# Altium PCB Power_Board_Gan_Cuk.PcbDoc (part 1 of 4)
Units mil, origin at the board's own origin, x right, y up, seen from the top; angles counter-clockwise.
Board outline 9910 x 8913.25 mil, 5 copper layers (Top Layer, Middle 1, HF Layer, Middle 4, Bottom Layer), stack 37.051 mil thick; 394 components, 188 nets, 1156 pads, 1424 vias.
Unrouted connection lines stored in the file: 6.
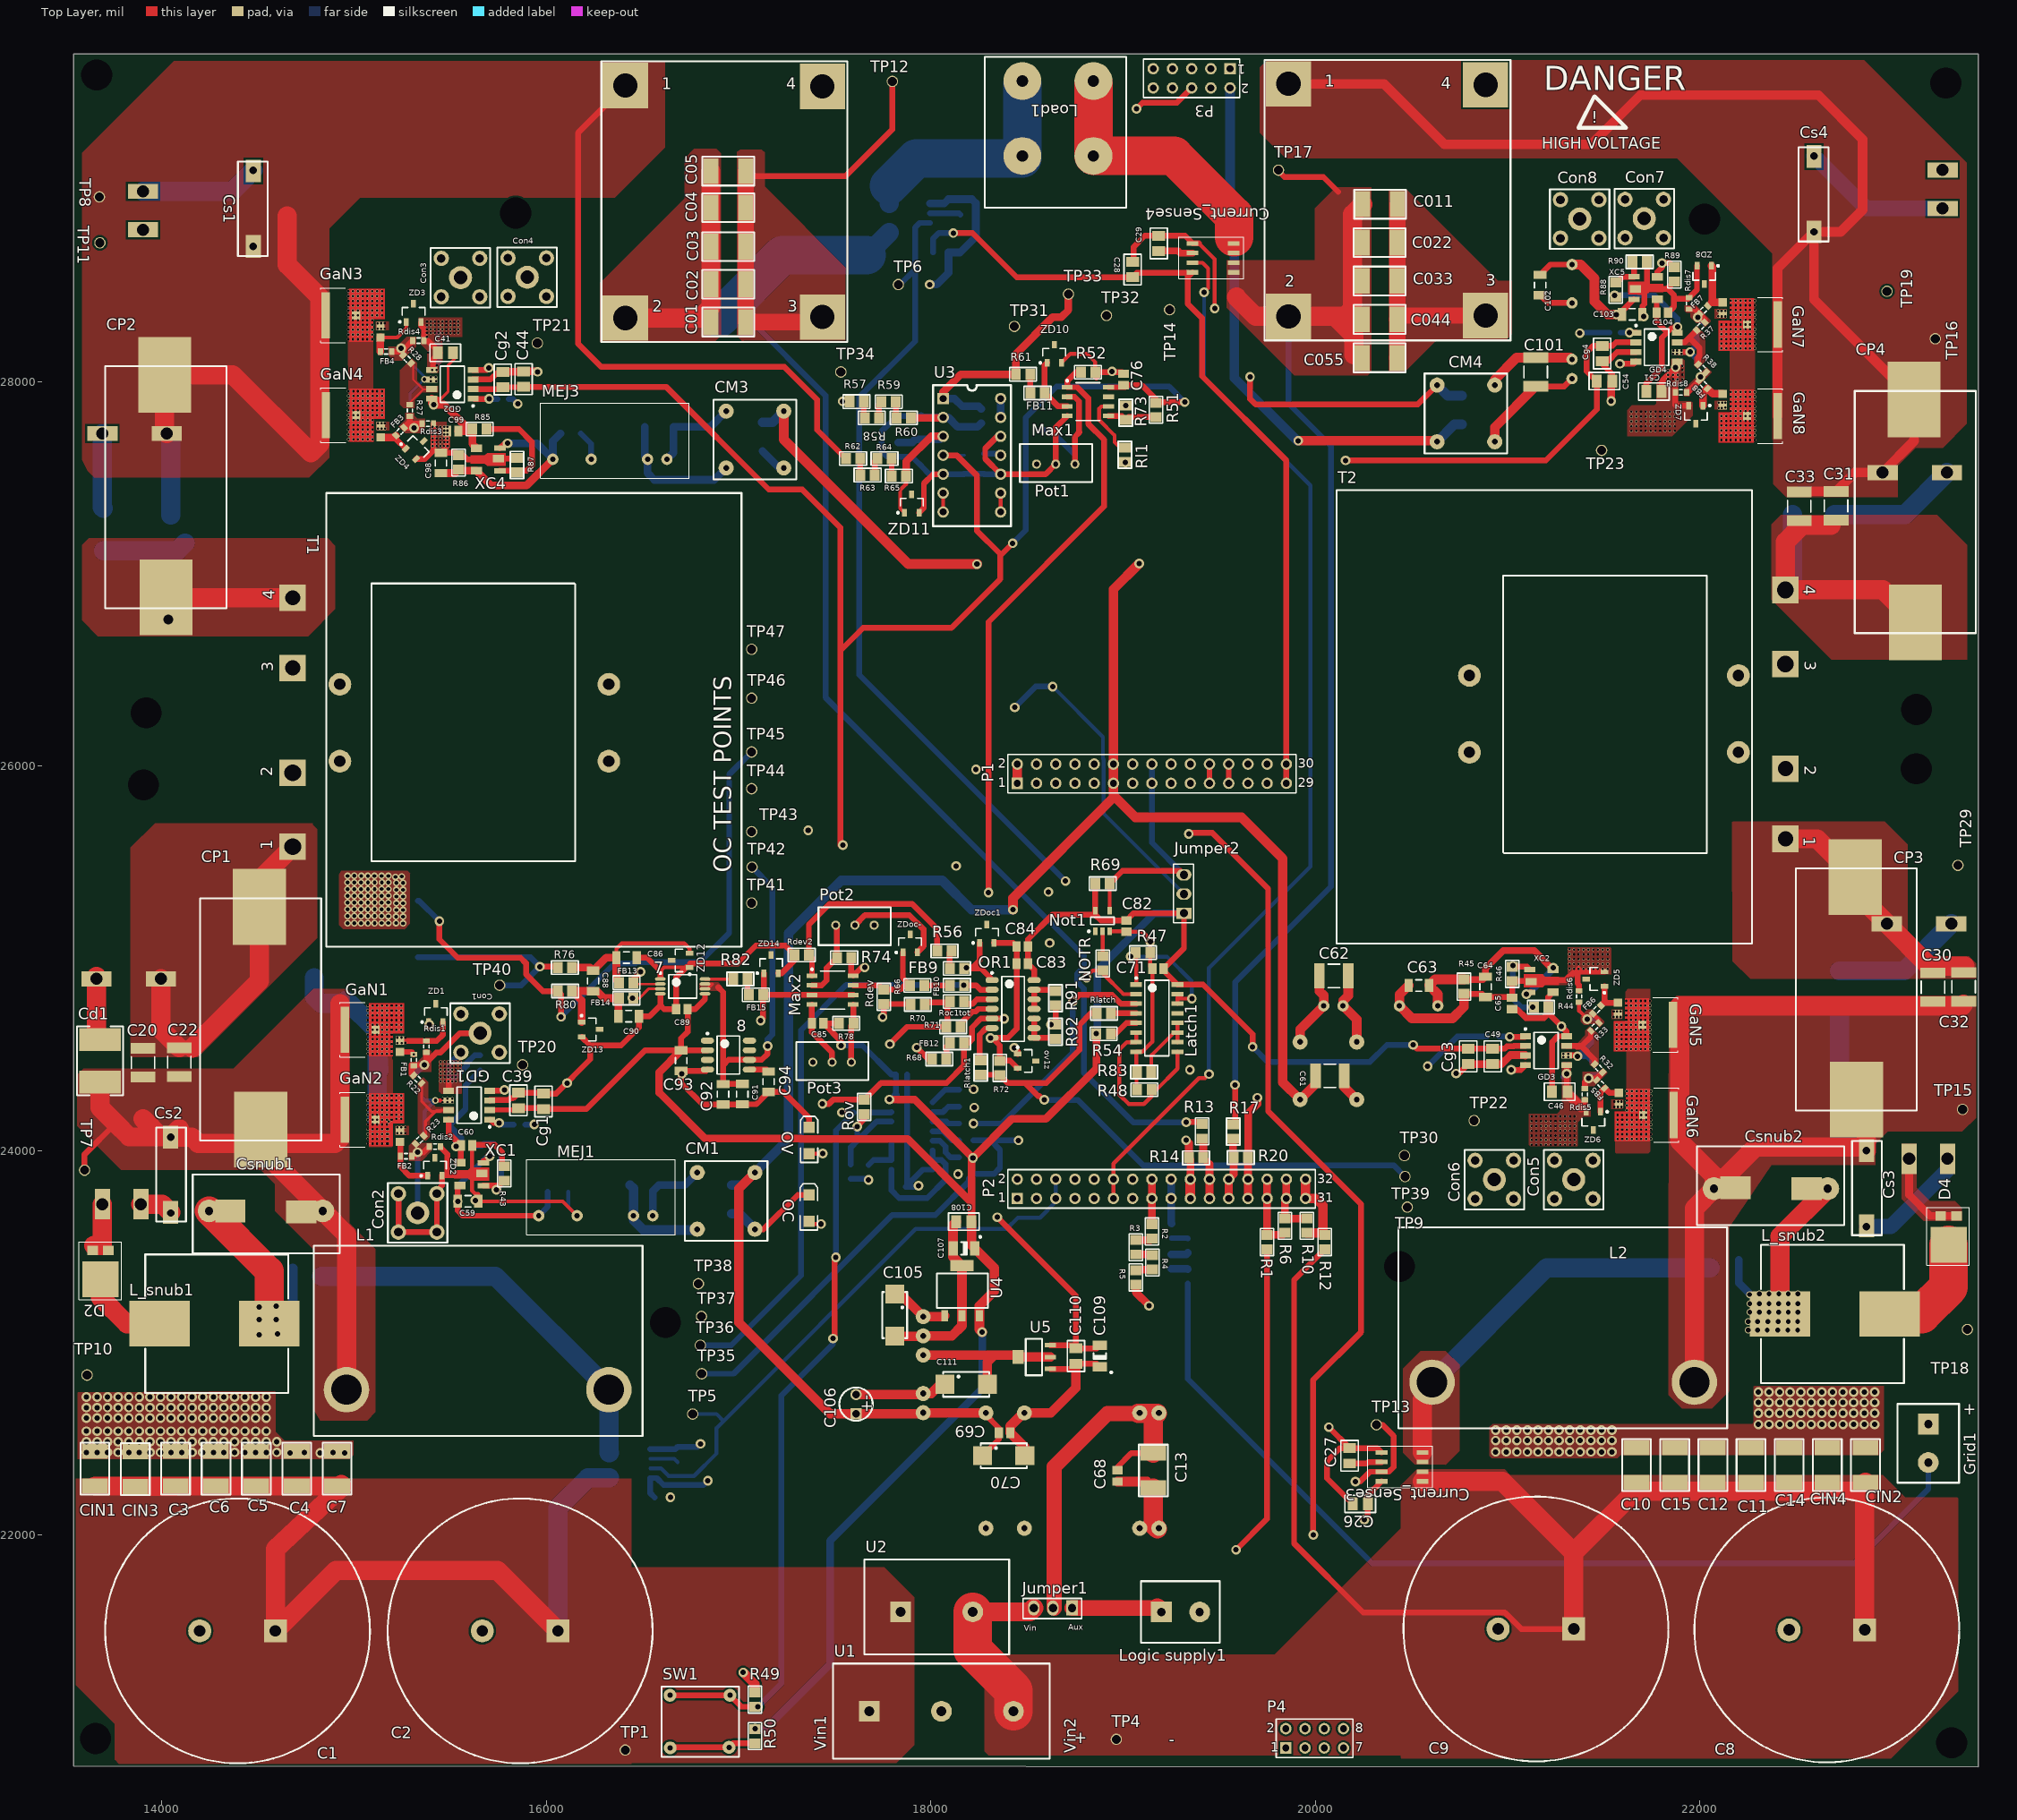
[diagram p0: Top Layer view]
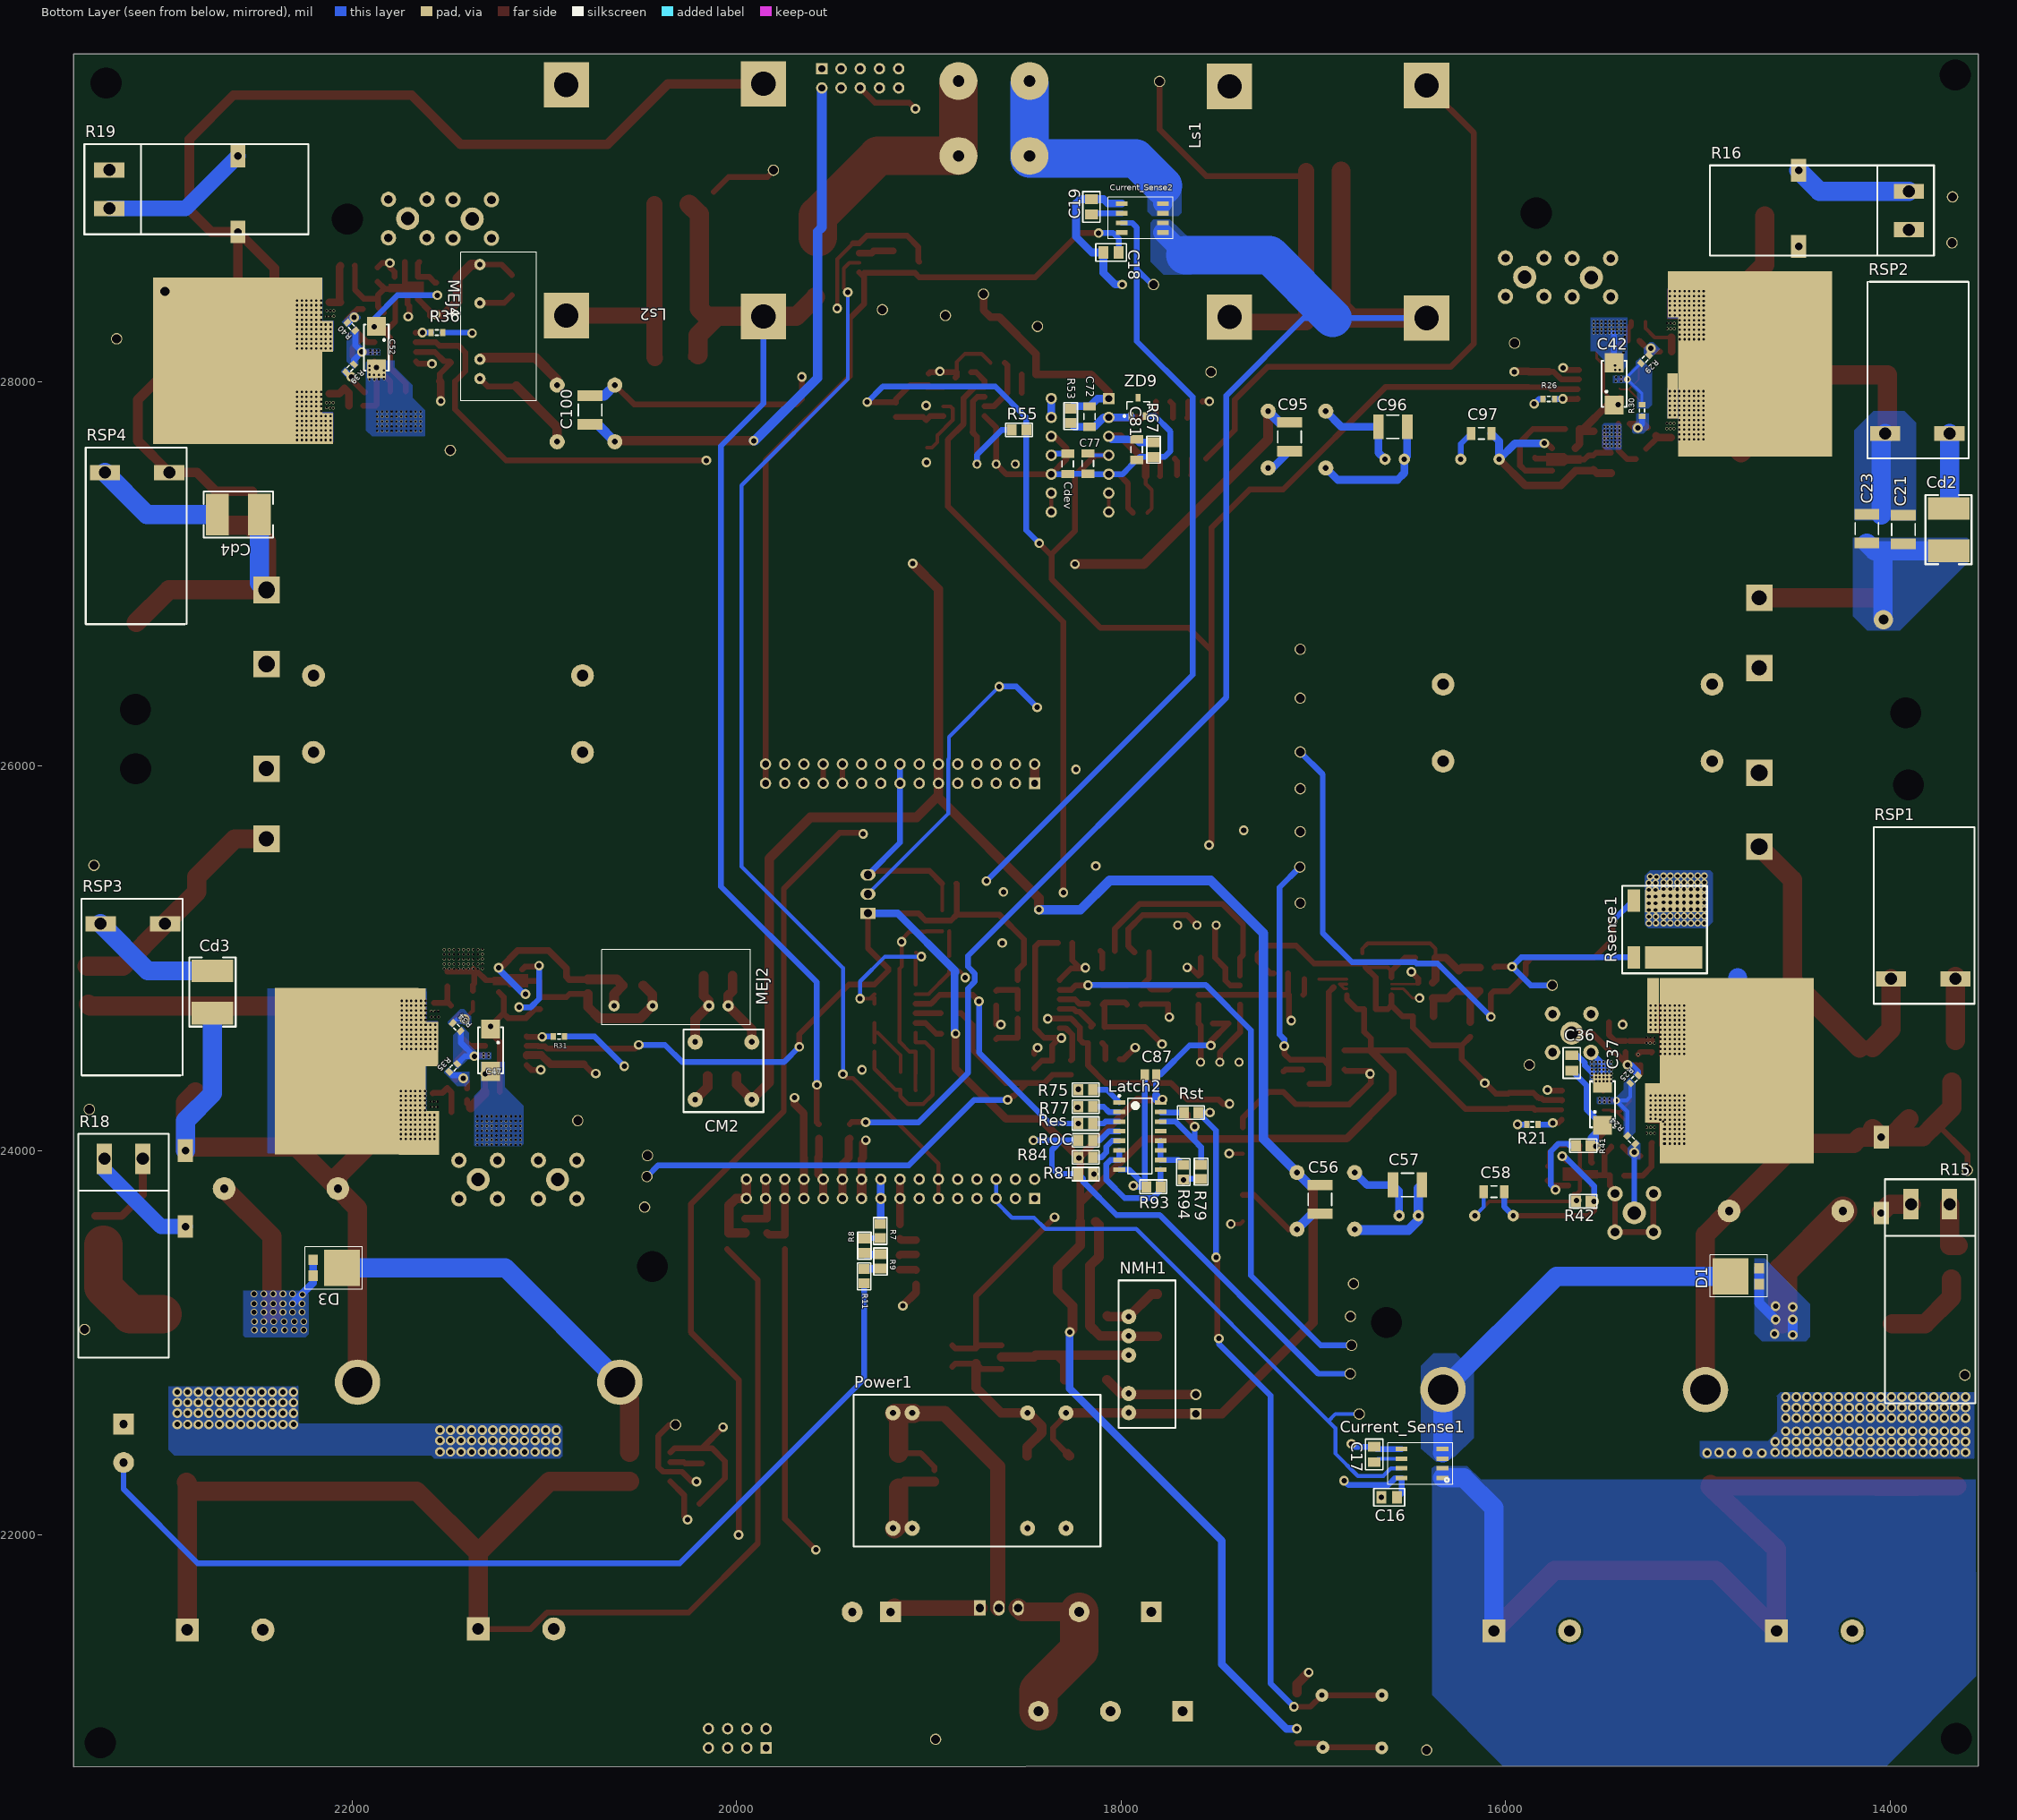
[diagram p1: Bottom Layer view, seen from below]
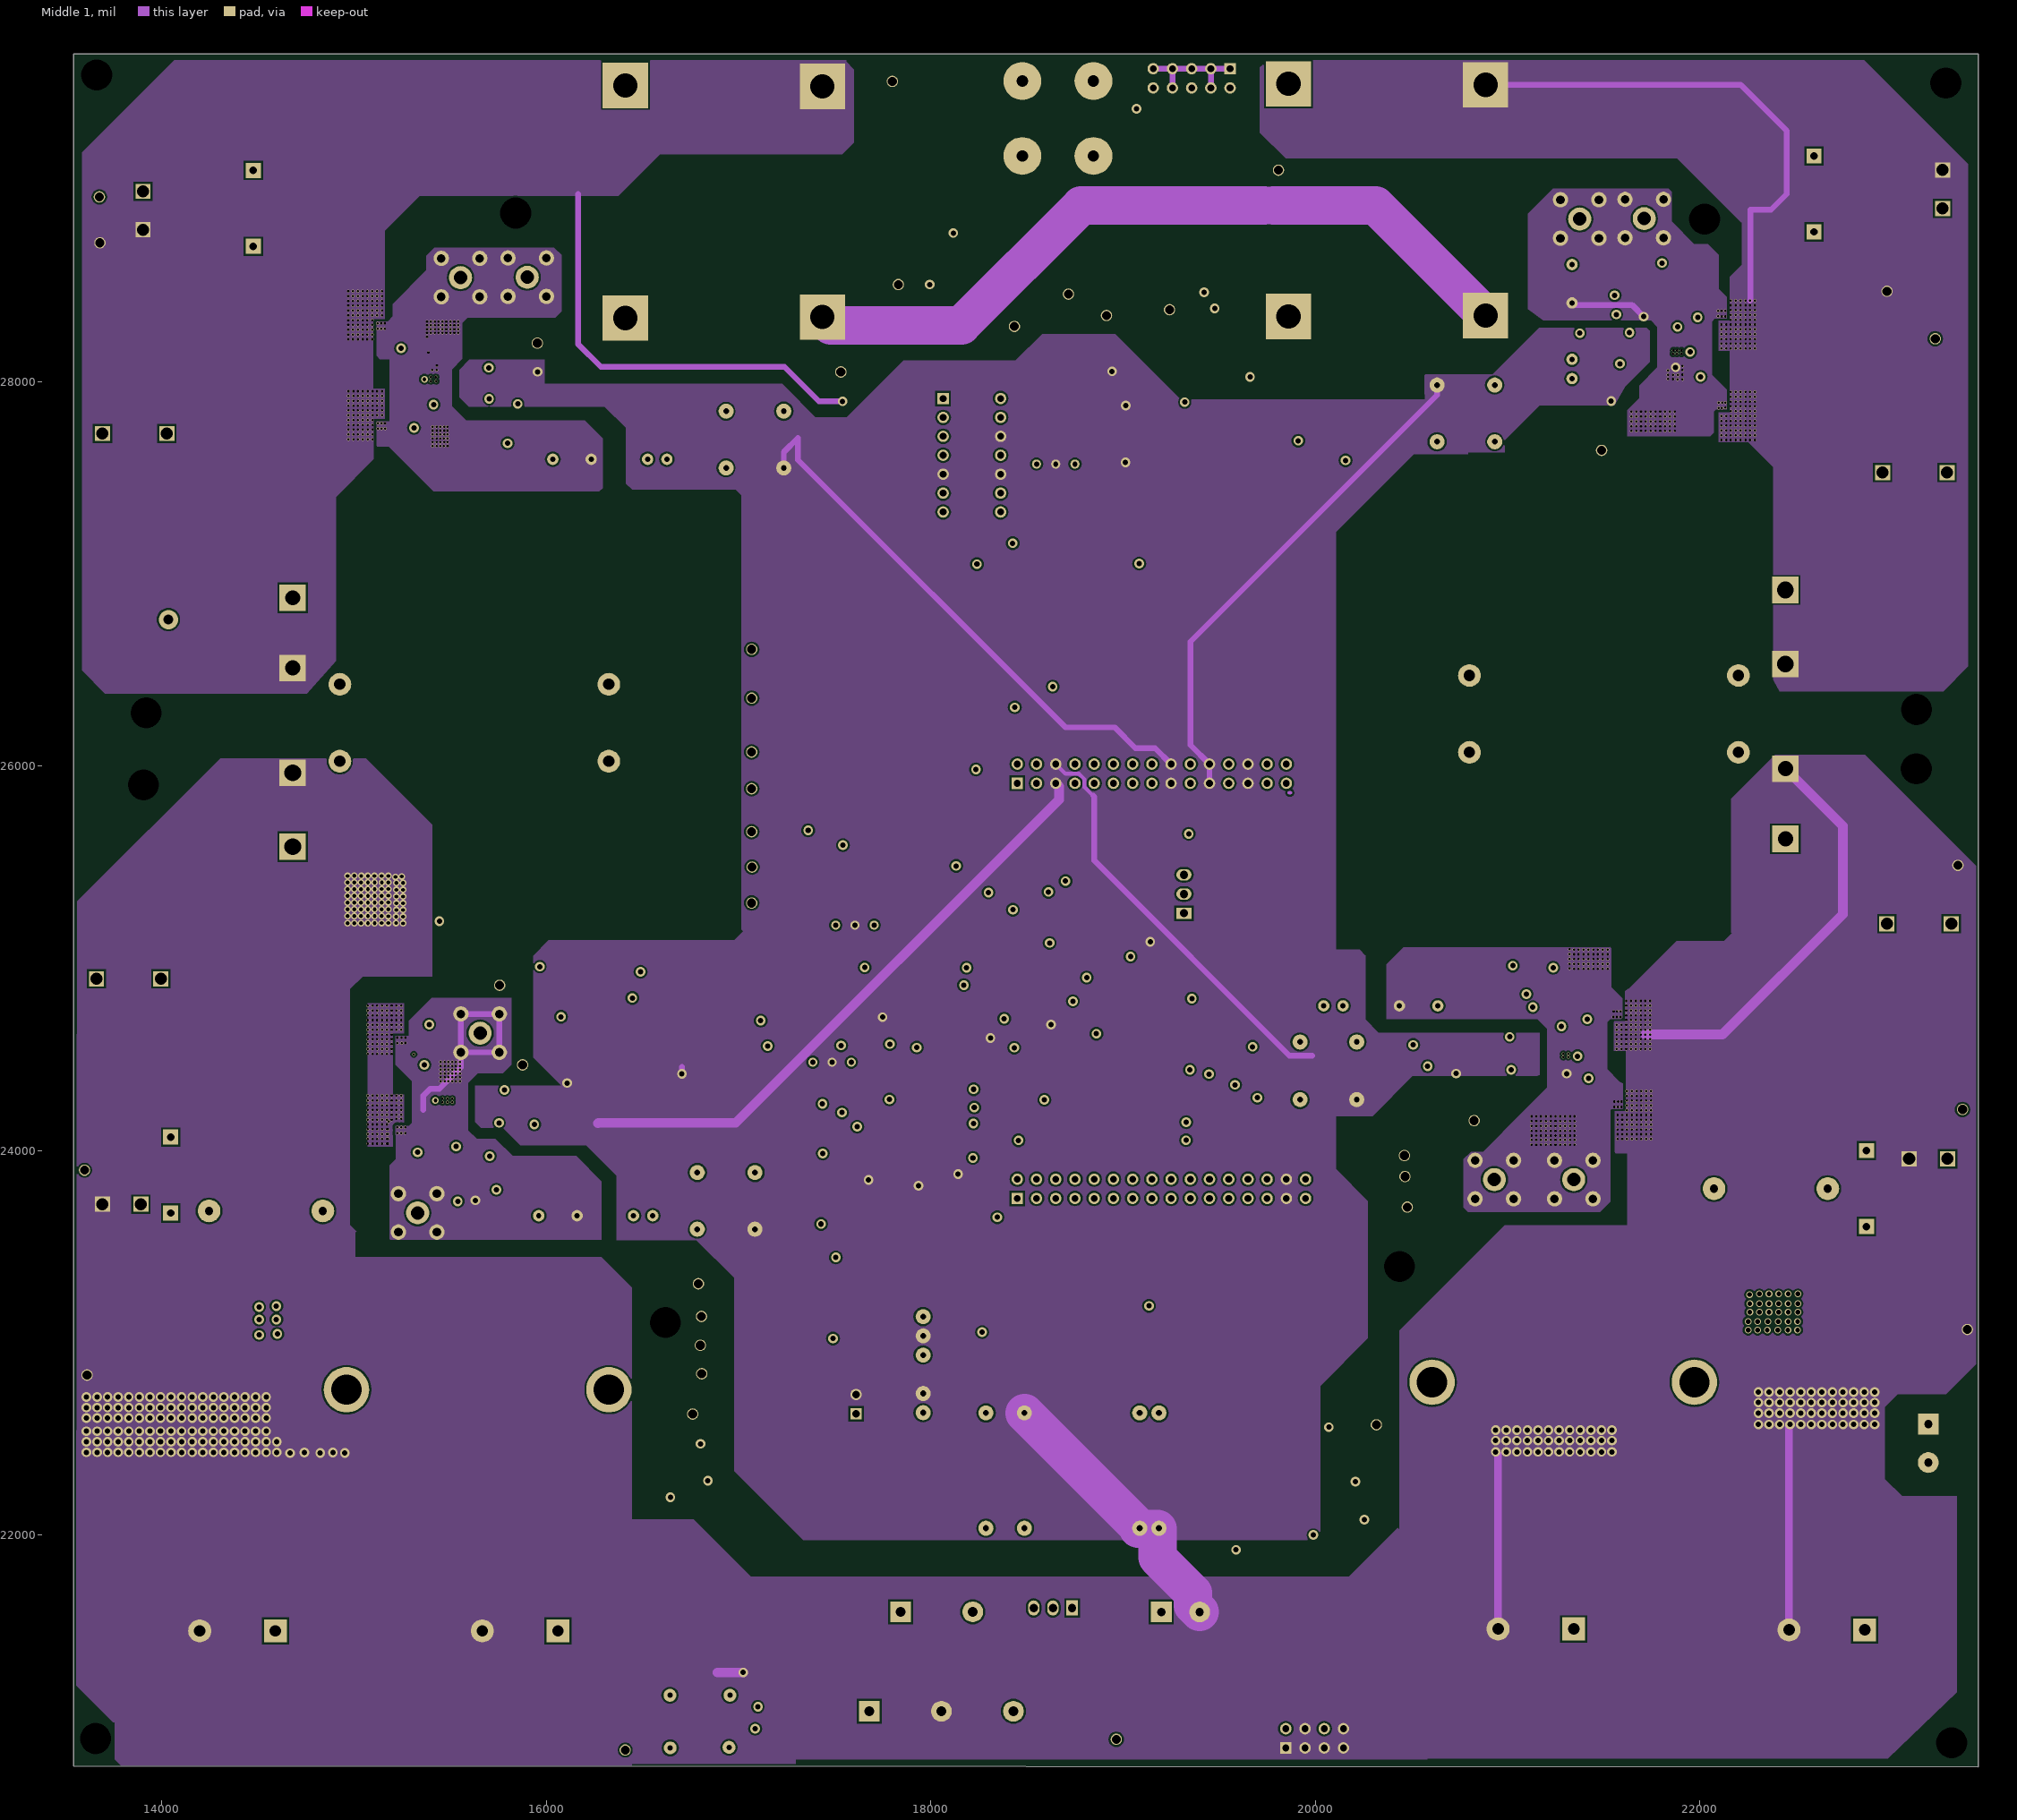
[diagram p2: Middle 1]
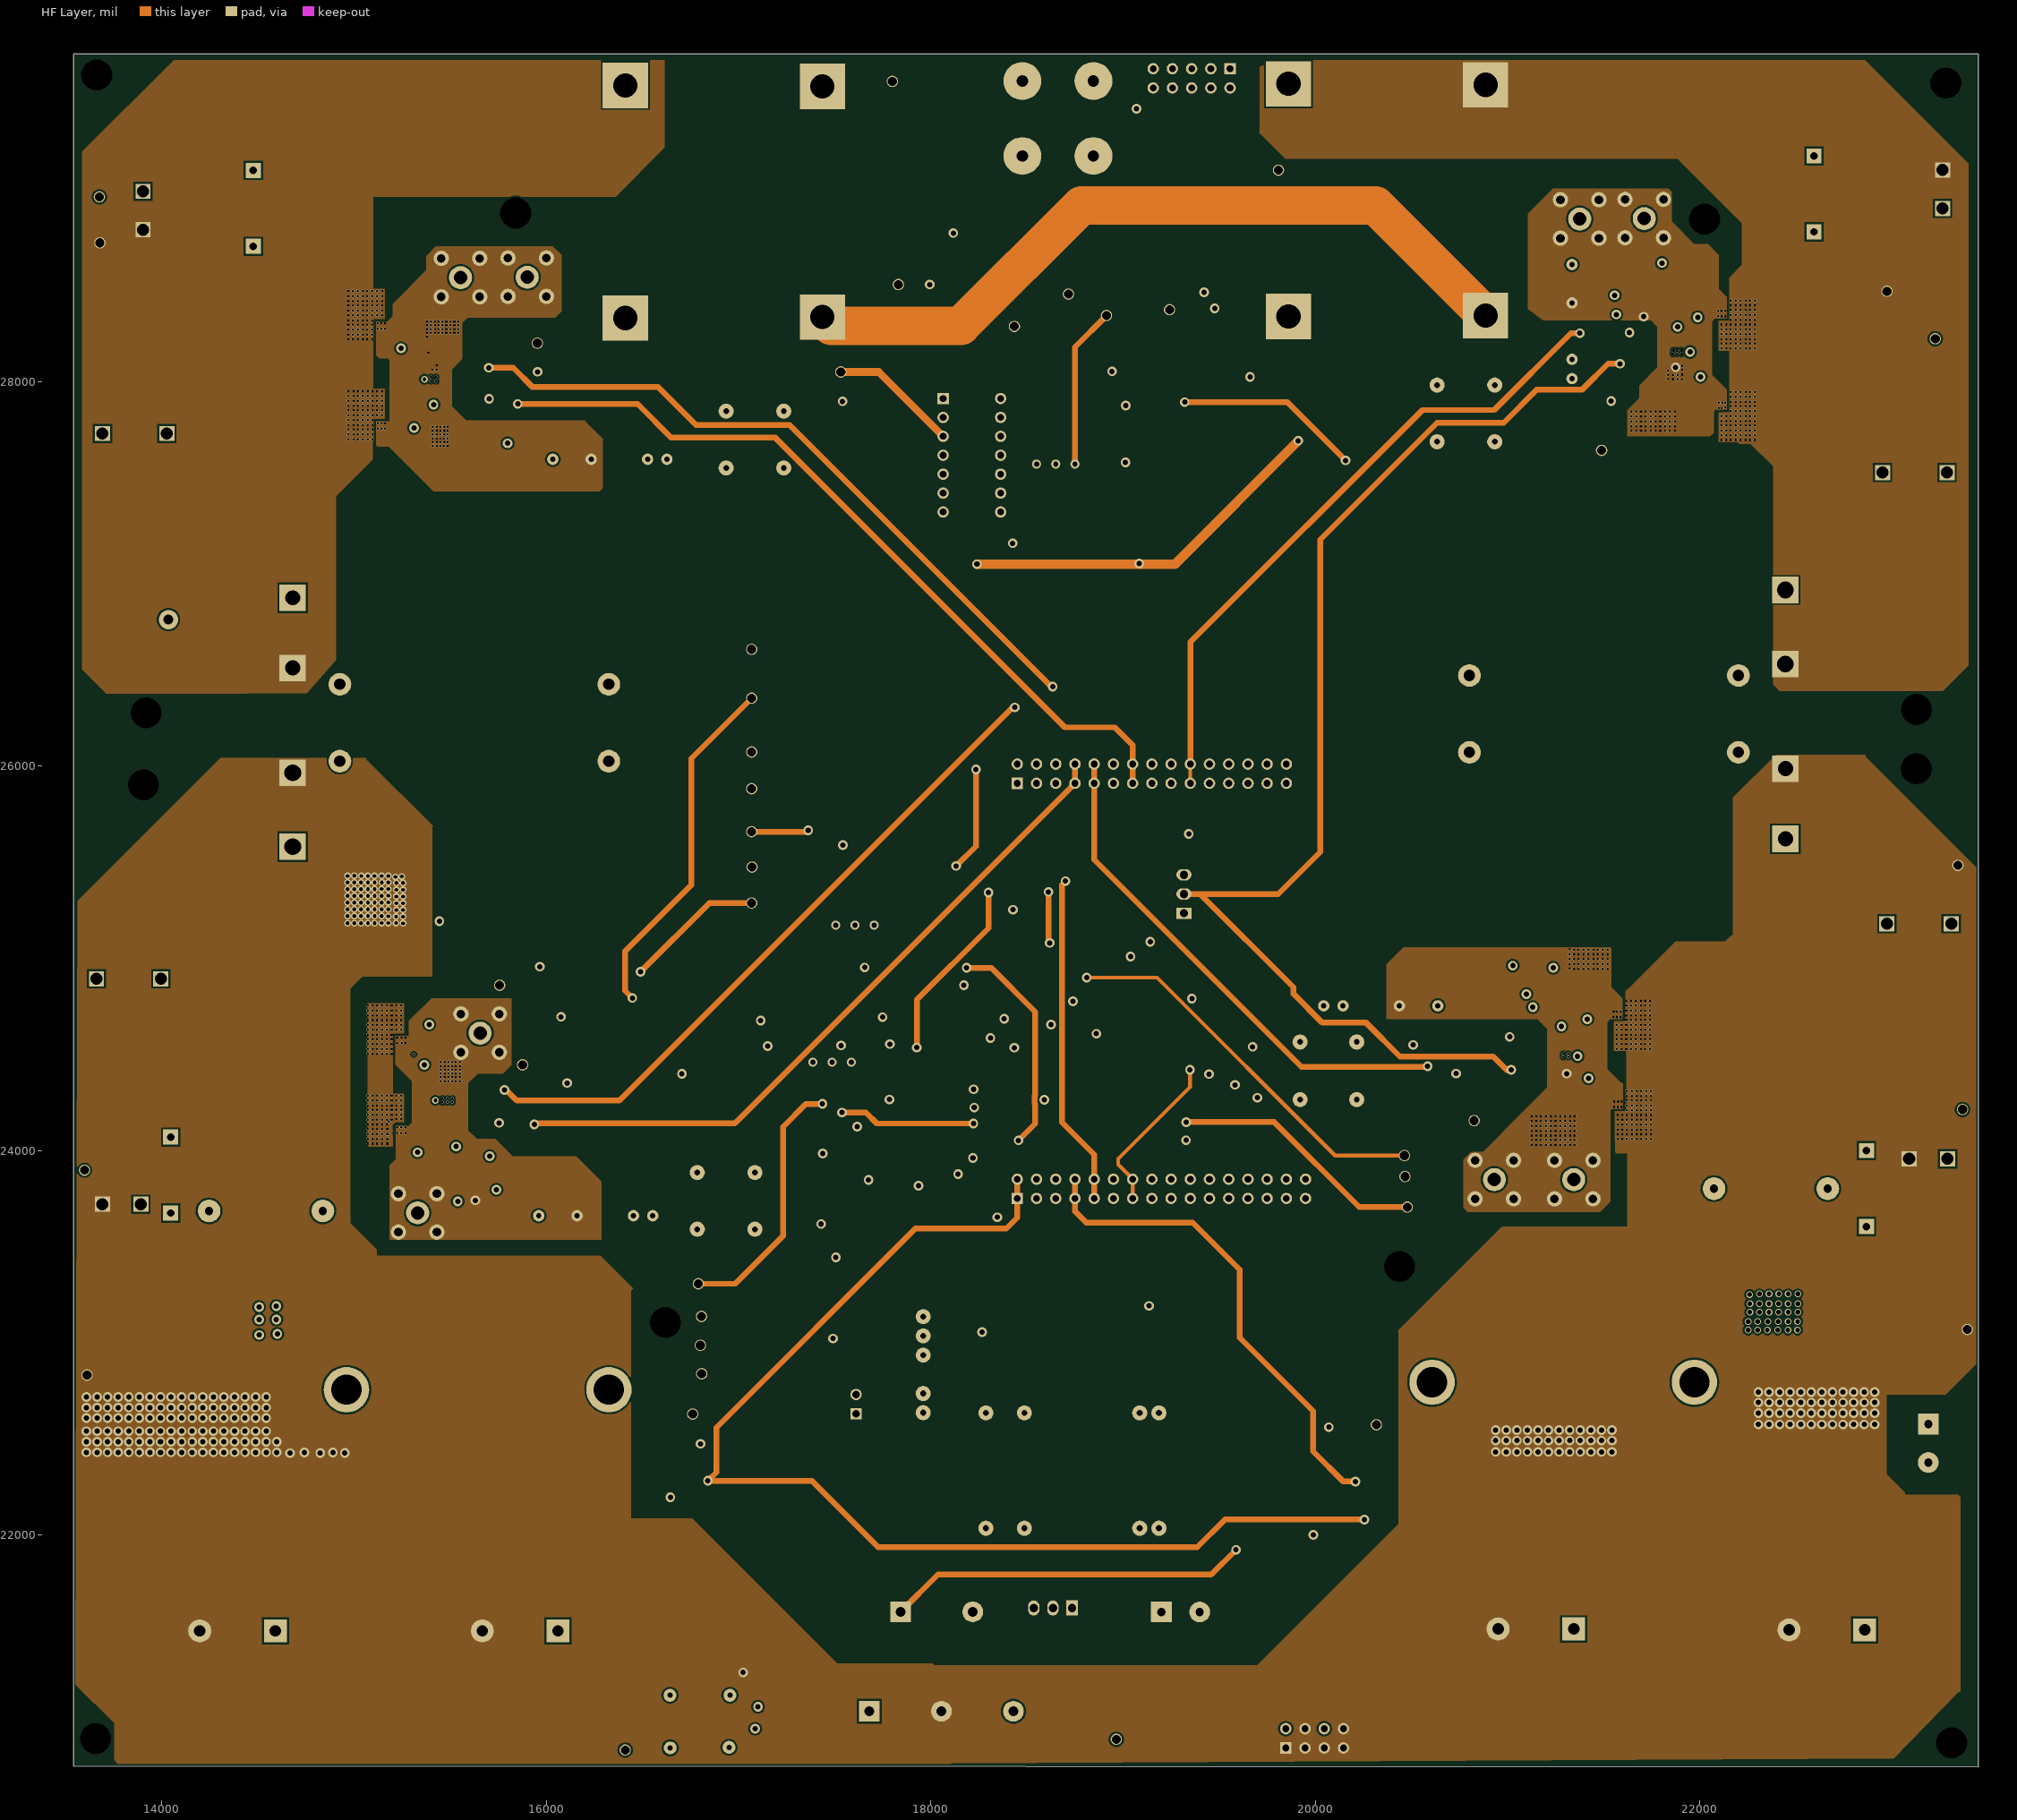
[diagram p3: HF Layer]
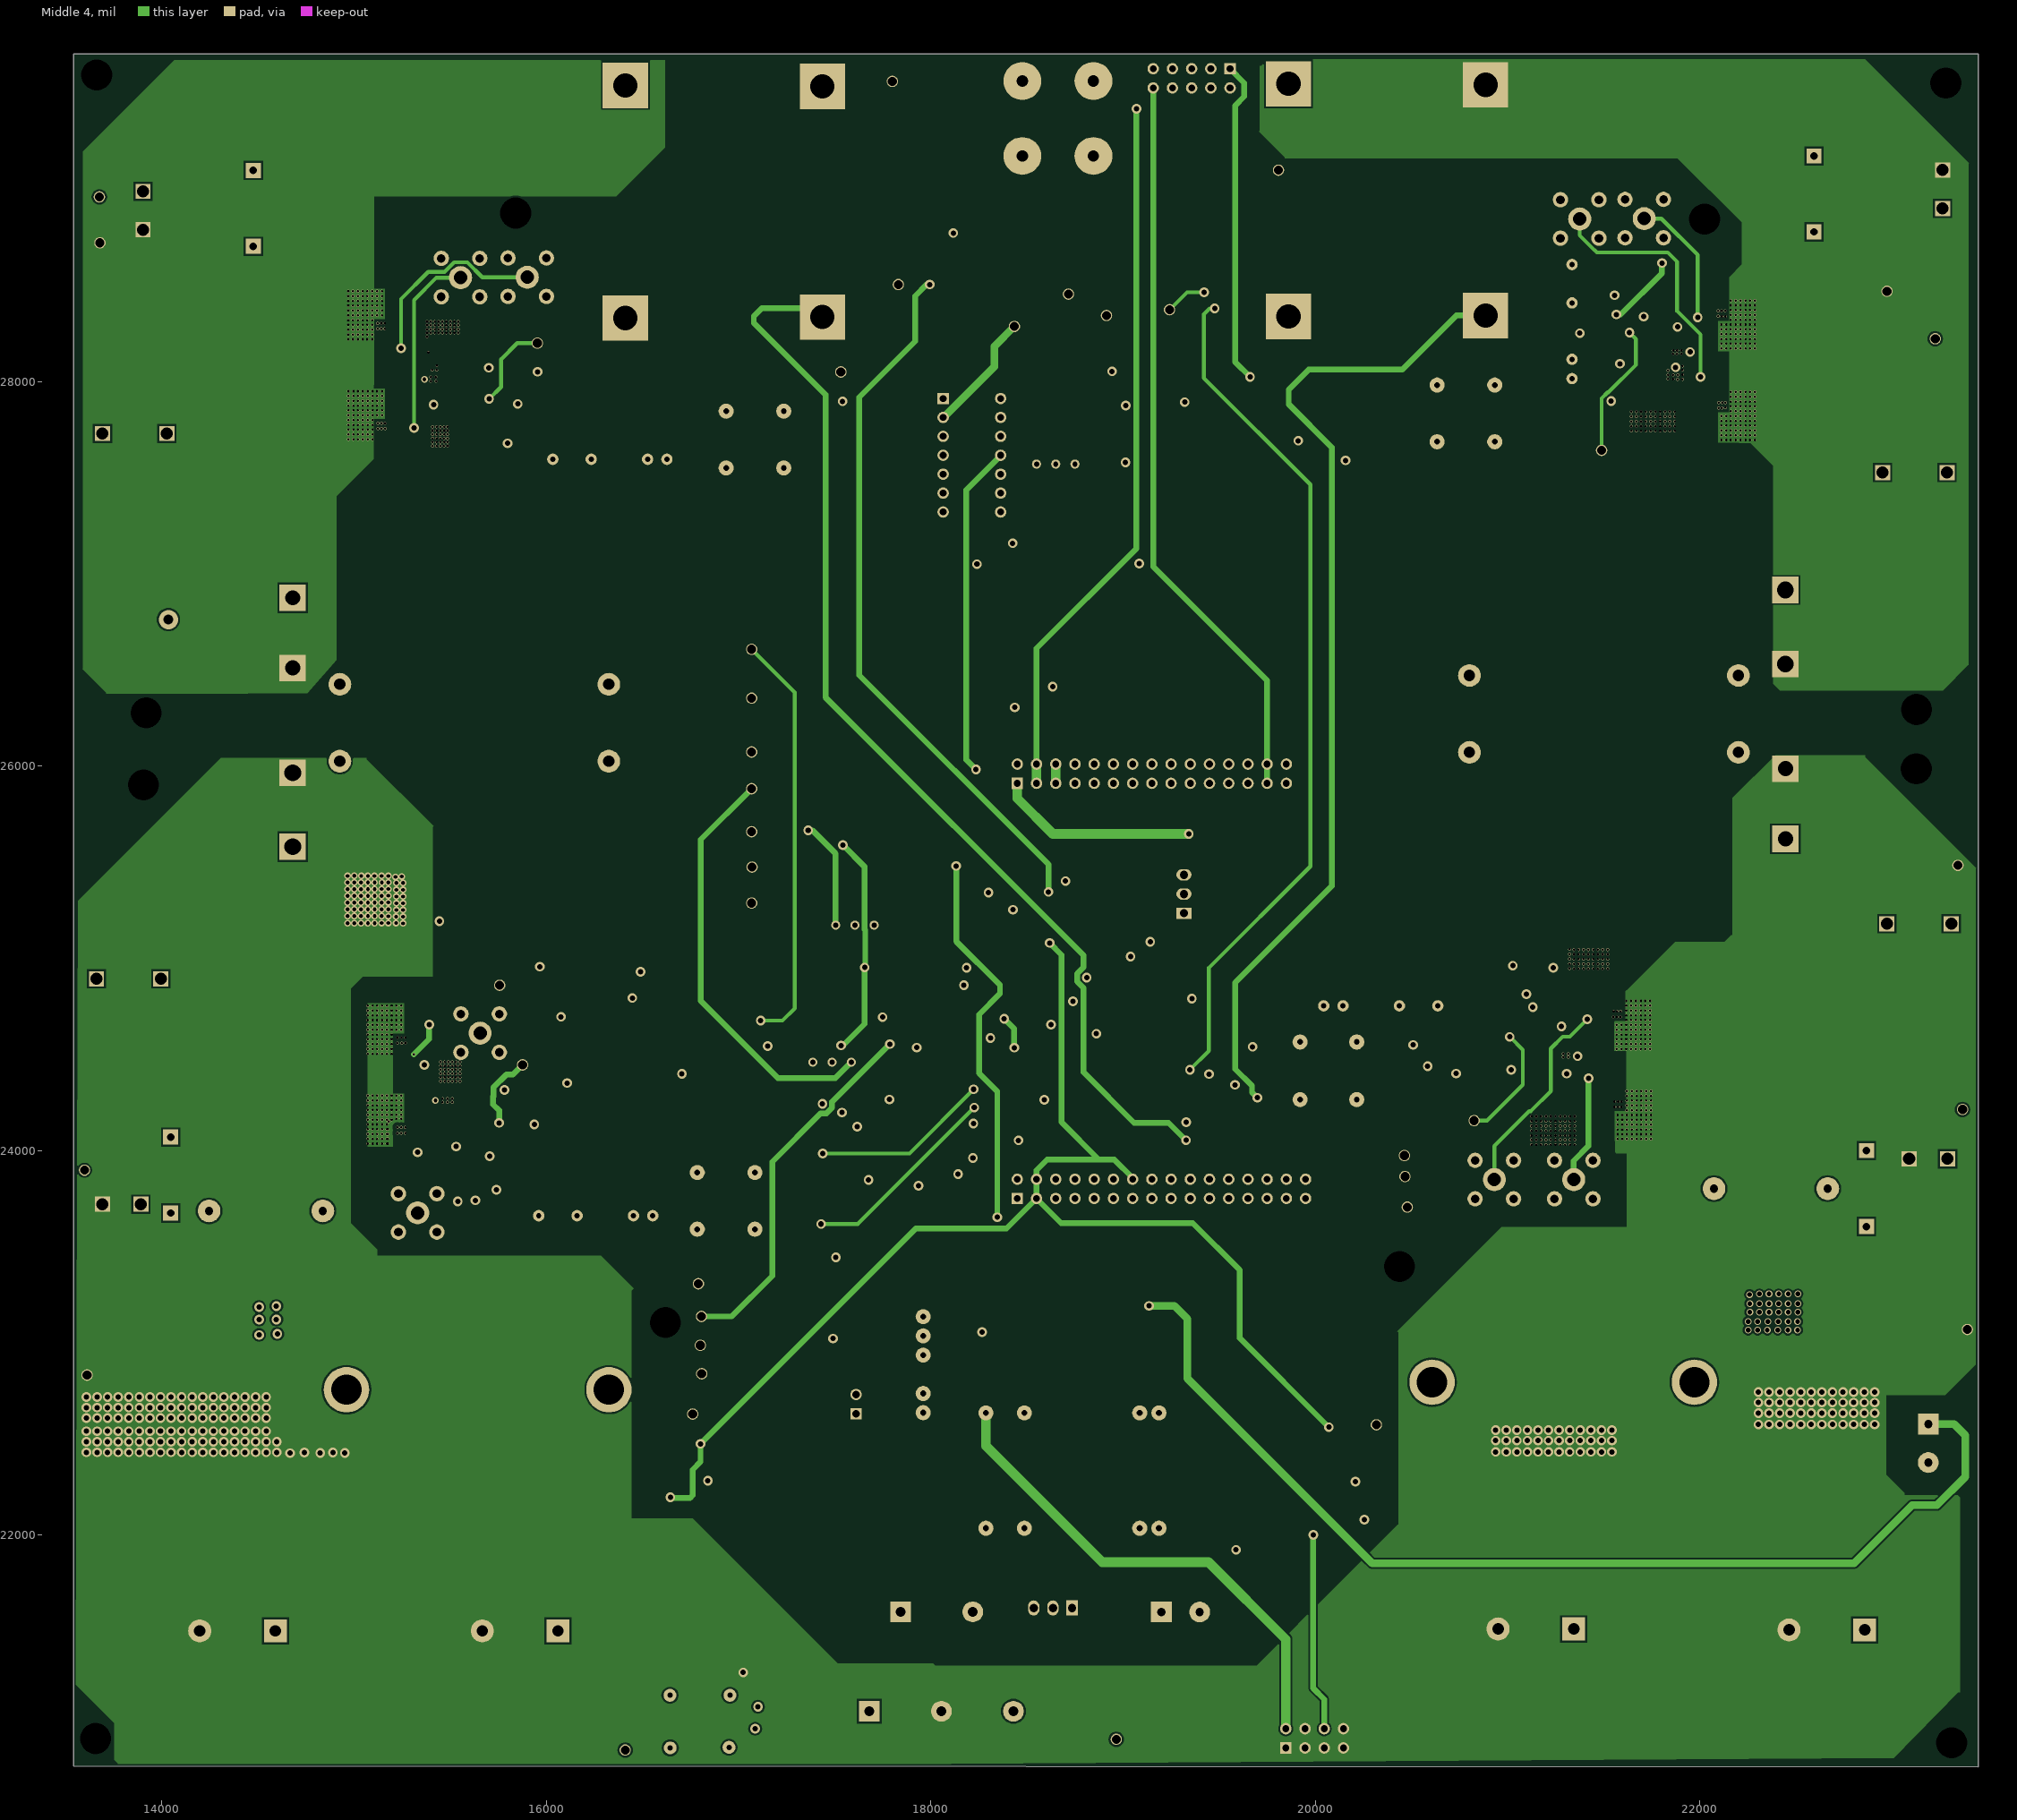
[diagram p4: Middle 4]

## Layer stack, top to bottom
Top Solder: solder mask 0.4, Solder Resist, Dk 3.5
Top Layer: signal copper 1.4
Dielectric 1: prepreg 5, FR-4, Dk 4.2
Middle 1: signal copper 1.417
Dielectric 3: core 10, Dk 4.2
HF Layer: signal copper 1.417
Dielectric 4: core 10, Dk 4.2
Middle 4: signal copper 1.417
Dielectric 2: prepreg 5, Dk 4.2
Bottom Layer: signal copper 1.4
Bottom Solder: solder mask 0.4, Solder Resist, Dk 3.5

## Board outline
13540,20797.49 23450,20791.75 23450,29705 13540,29705

## Design rules (kind name [scope] priority, off if disabled: settings)
AssemblyTestPointUsage [All] p1 off:
AssemblyTestpoint [All] p1 off: testpointundercomponent=TRUE minsize=40 maxsize=100 preferedsize=60 minholesize=0 maxholesize=40 preferedholesize=32 testpointgrid=1 usegrid=TRUE gridtolerance=0.01 allowsidetop=TRUE allowsidebottom=TRUE
Clearance [InComponentClass('Power_Board') vs InComponentClass('Power_Board')] p1: gap=20 ignorepadtopadclearanceinfootprint=TRUE
Clearance Clearance_2 [All] p2: gap=10 ignorepadtopadclearanceinfootprint=TRUE
Clearance Clearance_1 [InNet('NetC48_2')] p3: gap=10 ignorepadtopadclearanceinfootprint=TRUE
Clearance Clearance_4 [InNet('NetC48_1')] p4: gap=10 ignorepadtopadclearanceinfootprint=TRUE
Clearance Clearance_3 [InNet('GND_SS1') vs InComponentClass('Power_Board')] p5: gap=10 ignorepadtopadclearanceinfootprint=TRUE
ComponentClearance ComponentClearance_1 [(HasFootprint('Control Board')) vs (InComponentClass('All Components'))] p1: gap=10 collisioncheckmode=3 verticalgap=100000 showdistances=FALSE
ComponentClearance [All] p2: gap=10 collisioncheckmode=3 verticalgap=100000 showdistances=FALSE
FabricationTestPointUsage [All] p1 off: valid=0 allowmultiple=FALSE
FabricationTestpoint [All] p1 off: side=3 testpointundercomponent=TRUE minsize=40 maxsize=100 preferedsize=60 minholesize=0 maxholesize=40 preferedholesize=32 testpointgrid=1 allowsidetop=TRUE allowsidebottom=TRUE usegrid=TRUE gridtolerance=0.01
Height [All] p1 off: minheight=0 maxheight=3937.01 prefheight=500
HoleSize [All] p1: absolutevalues=TRUE maxlimit=200 minlimit=1 maxpercent=80.000 minpercent=20.000
HoleToHoleClearance [All] p1: gap=0 allowstackedmicrovias=TRUE
MinimumSolderMaskSliver [All] p1: minsoldermaskwidth=0
NetsToIgnore [All] p1 off:
PlaneClearance PlaneClearance_1 [(InComponentClass('Power_Board') AND InComponentClass('Power_Board'))] p1: clearance=50
PlaneClearance [All] p2: clearance=100
PlaneConnect [All] p1: planeconnectstyle=Direct reliefexpansion=20 reliefentries=4 reliefconductorwidth=10 reliefairgap=10
PolygonConnect [All] p1: connectstyle=Direct reliefconductorwidth=10 reliefentries=4 polygonreliefangle="90 Angle" airgapwidth=10
RoomDefinition Power_Board [InComponentClass('Power_Board')] p1 off: confinementstyle=ConfineIn formatcopy=TRUE lockcomponents=FALSE outline 13745,11300 19210,11300 19210,16145 13745,16145
RoomDefinition Power_Supply2 [InComponentClass('Power_Supply2')] p2 off: confinementstyle=ConfineOut formatcopy=TRUE lockcomponents=FALSE outline 24060,15500 36045,15500 36045,16395 24060,16395
RoomDefinition Protection_logic [InComponentClass('Protection_logic')] p3 off: confinementstyle=ConfineIn formatcopy=TRUE lockcomponents=FALSE outline 23895,26290 72890,26290 72890,28175 23895,28175
RoomDefinition Power_Supply [InComponentClass('Power_Supply')] p4 off: confinementstyle=ConfineIn formatcopy=TRUE lockcomponents=FALSE outline 34460,22615 37925,22615 37925,25510 34460,25510
RoomDefinition Gate_Drivers [InComponentClass('Gate_Drivers')] p5 off: confinementstyle=ConfineIn formatcopy=TRUE lockcomponents=FALSE outline 41615,24145 52705,24145 52705,24615 41615,24615
RoutingVias [All] p1: holewidth=28 width=50 viastyle="Through Hole" minholewidth=12 minwidth=15 maxholewidth=28 maxwidth=100
SilkToSilkClearance [All] p1: silktosilkclearance=0
SilkToSolderMaskClearance [IsPad] p1: minsilkscreentomaskgap=0 clearancetoexposedcopper=TRUE
SolderMaskExpansion [All] p1: expansion=4
UnConnectedPin [All] p1:
Width [All] p1: maxlimit=200 minlimit=10 preferedwidth=50
17 further rules are at their usual default settings.

## Classes and differential pairs
component class Power_Supply2: C95 C96 C97 C98 C99 C100 C101 C102 C103 C104 C105 C106 C107 C108 C109 C110 C111 CM3 CM4 MEJ3 MEJ4 NMH1 R85 R86 R87 R88 R89 R90 U4 U5 XC4 XC5
component class Gate_Drivers: C36 C37 C39 C41 C42 C44 C46 C47 C49 C51 C52 C54 Cg1 Cg2 Cg3 Cg4 Con1 Con2 Con3 Con4 Con5 Con6 Con7 Con8 FB1 FB2 FB3 FB4 FB5 FB6 FB7 FB8 GD1 GD2 GD3 GD4 R21 R22 R23 R24 R25 R26 R27 R28 R29 R30 R31 R32 R33 R34 R35 R36 R37 R38 R39 R40 Rdis1 Rdis2 Rdis3 Rdis4 Rdis5 Rdis6 Rdis7 Rdis8 TP20 TP21 TP22 TP23 ZD1 ZD2 ZD3 ZD4 ZD5 ZD6 ZD7 ZD8
component class Power_Board: 1 C01 C1 C2 C02 C03 C3 C4 C04 C05 C5 C6 C7 C8 C9 C10 C11 C011 C12 C13 C14 C15 C16 C17 C18 C19 C20 C21 C22 C022 C23 C26 C27 C28 C29 C30 C31 C32 C33 C033 C044 C055 Cd1 Cd2 Cd3 Cd4 CIN1 CIN2 CIN3 CIN4 CP1 CP2 CP3 CP4 Cs1 Cs2 Cs3 Cs4 Csnub1 Csnub2 Current_sense1 Current_Sense1 Current_Sense2 Current_Sense3 Current_Sense4 D1 D2 D3 D4 GaN1 GaN2 GaN3 GaN4 GaN5 GaN6 GaN7 GaN8 GaN? Grid1 "Heat Sink1" Jumper1 L1 L2 L_snub1 L_snub2 Load1 "Logic supply1" Ls1 Ls2 P1 P2 P3 P4 R1 R2 R3 R4 R5 R6 R7 R8 R9 R10 R11 R12 R13 R14 R15 R16 R17 R18 R19 R20 Rsense1 RSP1 RSP2 RSP3 RSP4 T1 T2 TP1 TP4 TP5 TP6 TP7 TP8 TP9 TP10 TP11 TP12 TP13 TP14 TP15 TP16 TP17 TP18 TP19 U1 U2
component class Power_Supply: C56 C57 C58 C59 C60 C61 C62 C63 C64 C65 C68 C69 C70 CM1 CM2 MEJ1 MEJ2 Power1 R41 R42 R43 R44 R45 R46 TP29 XC1 XC2
component class Protection_logic: 7 8 30 C66 C71 C72 C76 C77 C81 C82 C83 C84 C85 C86 C87 C88 C89 C90 C91 C92 C93 C94 Cdev FB9 FB10 FB11 FB12 FB13 FB14 FB15 Jumper2 Latch1 Latch2 Max1 Max2 Not1 NOTR OC OR1 OV ov1z Pot1 Pot2 Pot3 R47 R48 R49 R50 R51 R52 R53 R54 R55 R56 R57 R58 R59 R60 R61 R62 R63 R64 R65 R66 R67 R68 R69 R70 R71 R72 R73 R74 R75 R76 R77 R78 R79 R80 R81 R82 R83 R84 R91 R92 R93 R94 Rdev Rdev2 Res Rl1 Rlatch Rlatch1 ROC Roc1tot Rov Rst SW1 TP30 TP31 TP32 TP33 TP34 TP35 TP36 TP37 TP38 TP39 TP40 TP41 TP42 TP43 TP44 TP45 TP46 TP47 U3 ZD9 ZD10 ZD11 ZD12 ZD13 ZD14 ZDoc1 ZDoc-

## Components (designator, comment, footprint, x,y, rotation, side; value= is the part's Value field where it differs from the comment)
1 "Control Board" "Control Board" 27314,25301 r0 top
7 "INA240A1" INA240 16709,24853 r0 top
8 "REF5025AIDR" REF52.5 16947,24496 r0 top
C1 "3300uF" "Cap_3300uF_35mm height" 14196.3,21500 r0 top
C01 "Output_cap" "Output cap" 16950,28320 r270 top
C2 "3300uF" "Cap_3300uF_35mm height" 15666.3,21500 r0 top
C02 "Output_cap" "Output cap" 16950,28516.25 r270 top
C03 "Output_cap" "Output cap" 16950,28712.5 r270 top
C3 "Output_cap" "Output cap" 14061,22348 r0 top
C04 "Output_cap" "Output cap" 16949.58,28915 r270 top
C4 "Output_cap" "Output cap" 14691,22348 r0 top
C05 "Output_cap" "Output cap" 16950,29105 r270 top
C5 "Output_cap" "Output cap" 14481,22348 r0 top
C6 "Output_cap" "Output cap" 14271,22348 r0 top
C7 "Output_cap" "Output cap" 14901,22348 r0 top
C8 "3300uF" "Cap_3300uF_35mm height" 22465,21505 r0 top
C9 "3300uF" "Cap_3300uF_35mm height" 20951.3,21510 r0 top
C10 "Output_cap" "Output cap" 21662,22367.06 r0 top
C011 "Output_cap" "Output cap" 20342,28933 r270 top
C11 "Output_cap" "Output cap" 22257.5,22367.06 r0 top
C12 "Output_cap" "Output cap" 22059,22367.06 r0 top
C13 "Output_cap" "Output cap" 19168,22330 r180 top
C14 "Output_cap" "Output cap" 22456,22367.06 r0 top
C15 "Output_cap" "Output cap" 21860.5,22367.06 r0 top
C16 "100nF" Cap_SMD 16600,22195 r90 bottom
C17 "100nF" Cap_SMD 16683,22413 r180 bottom
C18 "100nF" Cap_SMD 18047,28672 r90 bottom
C19 "100nF" Cap_SMD 18154,28904 r180 bottom
C20 "Cap Pol3" 1812 13901,24457 r90 top value=0.1uF/1k
C21 "Cap Pol3" 1812 13930,27230 r90 bottom value="0.1uF/ 1k"
C022 "Output_cap" "Output cap" 20339,28733.25 r270 top
C22 "Cap Pol3" 1812 14090,24459 r90 top value=0.1uF/1k
C23 "Cap Pol3" 1812 14120,27235.2 r90 bottom value=0.1uF/1K
C26 "100nF" Cap_SMD 20239,22161 r90 top
C27 "100nF" Cap_SMD 20179,22406 r0 top
C28 "100nF" Cap_SMD 19050,28578 r0 top
C29 "100nF" Cap_SMD 19186,28714 r0 top
C30 "Cap Pol3" 1812 23214,24849 r90 top value=100pF
C31 "Cap Pol3" 1812 22710,27354.2 r90 top value=100pF
C32 "Cap Pol3" 1812 23374,24851 r90 top value=100pF
C033 "Output_cap" "Output cap" 20339,28533.5 r270 top
C33 "Cap Pol3" 1812 22518,27351.2 r90 top value=100pF
C36 "100nF" Cap_SMD 15655,24450 r180 bottom
C37 "22uF" Cap_tantalum 15500,24225 r180 bottom
C39 "100nF" Cap_SMD 15855,24255 r0 top
C41 "100nF" Cap_SMD 15479,28150 r90 top
C42 "22uF" Cap_tantalum 15440,27973 r180 bottom
C044 "Output_cap" "Output cap" 20339,28333.75 r270 top
C44 "100nF" Cap_SMD 15880.88,28008 r0 top
C46 "100nF" Cap_SMD 21267,24305 r270 top
C47 "22uF" Cap_tantalum 21276,24536 r0 bottom
C49 "100nF" Cap_SMD 20923,24494 r180 top
C51 "100nF" Cap_SMD 21757,27948 r270 top
C52 "22uF" Cap_tantalum 21870,28192 r0 bottom
C54 "100nF" Cap_SMD 21500,28003 r270 top
C055 "Output_cap" "Output cap" 20339,28134 r270 top
C56 "16V" 1812 16965,23745 r270 bottom value=10uF
C57 "Cap Pol3" 1812 16510,23820 r180 bottom value=10uF/16V
C58 "16V" C1206 16060,23785 r180 bottom value=10uF
C59 "Cap Semi" C1206 15591.85,23735 r180 top value=0.22uF/25V
C60 "Cap Pol3" C0805 15585,24025 r0 top value="1uF/ 25V"
C61 "Cap Pol3" 1812 20076,24388 r0 top value="10uF/ 16V"
C62 "Cap Pol3" 1812 20096.8,24908 r0 top value=10uF/16V
C63 "Cap Semi" C1206 20539,24858 r0 top value=10uF/16V
C64 "Cap Semi" C1206 20886,24851 r90 top value=0.22uF/25V
C65 "Cap Pol3" C0805 21024,24765 r90 top value="1uF/ 25V"
C68 "Cap Pol3" C0805 18971,22306 r270 top value="470nF/ 100V"
C69 "Cap Pol3" C0805 18384,22531 r0 top value=1uF/25V
C70 "22uF" Cap_tantalum 18364,22416 r270 top
C71 "Cap Pol3" C0805 19182,24946 r180 top value="0.1uF/ 16V"
C72 "16V" C1206 18164,27817.85 r270 bottom value=1nF
C76 "Cap Pol3" C0805 19002,28011.53 r90 top value="0.1uF/ 16V"
C77 "16V" C1206 18173,27573 r90 bottom value=0.1uF
C81 "16V" C1206 17919,27646 r270 bottom value=1nF
C82 "Cap Pol3" C0805 19018,25167 r270 top value="0.1uF/ 16V"
C83 "Cap Pol3" C0805 18476,24971 r180 top value="0.1uF/ 16V"
C84 "Cap Pol3" C0805 18476,25061 r180 top value="0.1uF/ 16V"
C85 "Cap Pol3" C0805 17411,24661 r180 top value="0.1uF/ 16V"
C86 "16V" C1206 16417,25003 r0 top value=1nF
C87 "Cap Pol3" C0805 17847,24394 r0 bottom value="0.1uF/ 16V"
C88 "16V" C1206 16243,24881.85 r90 top value=1nF
C89 "Cap Pol3" C0805 16705,24735 r180 top value="0.1uF/ 16V"
C90 "16V" C1206 16428,24698 r180 top value=1nF
C91 "16V" C1206 17019,24293 r90 top value=50uF
C92 "16V" C1206 16919,24292 r90 top value=10uF
C93 "16V" C1206 16701,24467 r90 top value=1nF
C94 "16V" C1206 17156,24357 r90 top value=0.01u
C95 "16V" 1812 17124,27713 r270 bottom value=10uF
C96 "Cap Pol3" 1812 16586,27765 r180 bottom value=10uF/16V
C97 "16V" C1206 16126,27730 r180 bottom value=10uF
C98 "Cap Semi" C1206 15451,27577 r270 top value=0.22uF/25V
C99 "Cap Pol3" C0805 15512,27742 r180 top value="1uF/ 25V"
C100 "Cap Pol3" 1812 20763,27852 r90 bottom value="10uF/ 16V"
C101 "Cap Pol3" 1812 21147,28050 r90 top value=10uF/16V
C102 "Cap Semi" C1206 21170,28502 r90 top value=10uF/16V
C103 "Cap Semi" C1206 21649,28350 r180 top value=0.22uF/25V
C104 "Cap Pol3" C0805 21806,28359 r0 top value="1uF/ 25V"
C105 "Tantalium" "Cap tantal 22u-25V" 17812,23143 r270 top value=22uF
C106 "electrolytic" CAP-10u-16V 17611,22630 r90 top value=10uF
C107 "Tantalium/T520A226M006ATE090" "Cap Tantal 3216" 18177,23490 r180 top value=22uF
C108 "Cap" "Capacitor 0805" 18172,23629 r0 top value=470nF
C109 "Tantalium/T520A226M006ATE090" "Cap Tantal 3216" 18879,22925 r90 top value=22uF
C110 "Cap" "Capacitor 0805" 18754.95,22930 r270 top value=470nF
C111 "Tantalium" "Cap tantal 22u-25V" 18184,22783 r0 top value=22uF
Cd1 "15uF" Cd 13683,24466 r0 top
Cd2 "15uF" Cd 13690,27230 r180 bottom
Cd3 "15uF" Cd 22722,24824 r180 bottom
Cd4 "Cd" Cd 22593,27314 r90 bottom
Cdev "16V" C1206 18278,27572 r90 bottom value=0.1uF
Cg1 "100nF" Cap_SMD 15985,24250 r0 top
Cg2 "100nF" Cap_SMD 15773,28006 r0 top
Cg3 "100nF" Cap_SMD 20796,24494 r180 top
Cg4 "100nF" Cap_SMD 21493,28151 r180 top
CIN1 "Output_cap" "Output cap" 13641,22348 r0 top
CIN2 "Output_cap" "Output cap" 22873,22359 r180 top
CIN3 "Output_cap" "Output cap" 13851,22346.48 r0 top
CIN4 "Output_cap" "Output cap" 22674.5,22359 r180 top
CM1 "CMC-08" CMC-08 16965,23725 r90 top
CM2 "CMC-08" CMC-08 20081,24384 r180 bottom
CM3 "CMC-08" CMC-08 17115,27686 r90 top
CM4 "CMC-08" CMC-08 20754,27847 r270 top
Con1 "Component_1" PCBComponent_1 15655,24610 r0 top
Con2 "Component_1" PCBComponent_1 15330,23675 r270 top
Con3 "Component_1" PCBComponent_1 15553,28541 r0 top
Con4 "Component_1" PCBComponent_1 15900,28543 r0 top
Con5 "Component_1" PCBComponent_1 21345,23848 r0 top
Con6 "Component_1" PCBComponent_1 20932,23848 r0 top
Con7 "Component_1" PCBComponent_1 21712,28848 r0 top
Con8 "Component_1" PCBComponent_1 21376,28846 r0 top
CP1 "Cap_CP" Cap_cp 14518,24731 r270 top
CP2 "Cap_CP" Cap_cp 14025,27500 r270 top
CP3 "Cap_CP" Cap_cp 22820,24887 r270 top
CP4 "Cap_CP" Cap_cp 23127,27370 r270 top
Cs1 "990pF" Cap-Cs 14485,28888 r90 top
Cs2 "560p" Cap-Cs 14035,23885 r270 top
Cs3 "560pF" Cap-Cs 22858,23815 r270 top
Cs4 "Cap cdv16ff101j03" Cap-Cs 22605,28963 r90 top
Csnub1 "Cap DPPM10S22K-F" Cap-Csnub 14576.54,23662.95 r180 top
Csnub2 "Cap DPPM10S22K-F" Cap-Csnub 22335,23823 r0 top
Current_Sense1 "ACS712-05" SOIC-8 16400,22385 r0 bottom
Current_Sense2 "ACS712-05" SOIC-8 17855,28865 r0 bottom
Current_Sense3 "ACS712-05" SOIC-8 20485.88,22367.37 r180 top
Current_Sense4 "ACS712-05" SOIC-8 19503,28658 r180 top
D1 "Diode" TO-277A 14830,23345 r90 bottom
D2 "Diode" TO-277A 13680,23330 r180 top
D3 "Diode" TO-277A 22053.99,23389.66 r270 bottom
D4 "Diode" TO-277A 23295.34,23509.39 r180 top
FB1 "Res3" J1-0603 15310,24470 r90 top value=1K
FB2 "Res3" J1-0603 15270,23970 r180 top value=1K
FB3 "Res3" J1-0603 15238,27740 r225 top value=1K
FB4 "Res3" J1-0603 15165.88,28156.76 r180 top value=1K
FB5 "Res3" J1-0603 21485,24345 r315 top value=1K
FB6 "Res3" J1-0603 21465,24732 r45 top value=1K
FB7 "Res3" J1-0603 22021,28372 r45 top value=1K
FB8 "Res3" J1-0603 22020,27985 r315 top value=1K
FB9 "res_smd" res_smd 18136,24947 r180 top
FB10 "res_smd" res_smd 18136,24859 r180 top
FB11 "res_smd" res_smd 18555,27941 r180 top
FB12 "res_smd" res_smd 18136,24559 r180 top
FB13 "res_smd" res_smd 16416,24873 r180 top
FB14 "res_smd" res_smd 16416,24792 r180 top
FB15 "res_smd" res_smd 17090,24809 r180 top
GaN1 "GS66508B" GS66508B 15095.98,24629.84 r90 top
GaN2 "GS66508B" GS66508B 15095.98,24161.97 r90 top
GaN3 "GS66508B" GS66508B 14994.88,28346.97 r90 top
GaN4 "GS66508B" GS66508B 14995.98,27826.97 r90 top
GaN5 "GS66508B" GS66508B 21717.02,24651.03 r270 top
GaN6 "GS66508B" GS66508B 21721.02,24182.03 r270 top
GaN7 "GS66508B" GS66508B 22261.86,28295.03 r270 top
GaN8 "GS66508B" GS66508B 22261.86,27819.03 r270 top
GD1 "Si8271GB-IS" Si8271 15598,24235 r180 top
GD2 "Si8271GB-IS" Si8271 15511,27986 r180 top
GD3 "Si8271GB-IS" Si8271 21201,24519 r0 top
GD4 "Si8271GB-IS" Si8271 21776,28179 r0 top
Grid1 "Grid Input for sense" "Auxlilary connector" 23190.64,22574.74 r270 top
"Heat Sink1" "Heat sink" "Heat Sink" 13665,39760 r0 bottom
Jumper1 "p_jumper" Header1*3 18735,21620 r180 top
Jumper2 "p_jumper" Header1*3 19317.85,25234.21 r90 top
L1 "inductor" Inductor_small 15645,22775 r180 top
L2 "inductor" Inductor_small_mirror 21298,23079 r0 top
L_snub1 "Inductor smd" "Inductor surface mount" 14265,23105 r180 top
L_snub2 "Inductor smd" "Inductor surface mount" 22711,23142 r0 top
Latch1 "SR NOR Latch" "SR latch" 19176,24688 r0 top
Latch2 "SR NOR Latch" "SR latch" 17902,24075 r180 bottom
Load1 "Connector 60A" Connector_60A 19016,28904 r0 top
"Logic supply1" "Auxilary connector" "Auxlilary connector" 19200,21599 r0 top
Ls1 "Inductor_output" "Inductor output" 16895,28965 r270 bottom
Ls2 "Inductor_output" "Inductor output" 20344.9,28973.33 r270 bottom
Max1 "Comparator MAX942" "SOIC 8_ no EP" 18818,27895 r0 top
Max2 "Comparator MAX942" "SOIC 8_ no EP" 17490,24833 r0 top
MEJ1 "MEJ2S1212SC" MEJ2 16669.65,23758.43 r180 top
MEJ2 "MEJ2S1212SC" MEJ2 19928.16,24850.43 r0 bottom
MEJ3 "MEJ2S1212SC" MEJ2 16742.84,27694.43 r180 top
MEJ4 "MEJ2S1212SC" MEJ2 21237.57,27899.46 r90 bottom
NMH1 "NMH1209SC" NMH1209SC 17960,22635 r90 bottom
Not1 "SN74LVC1G04-EP" Inverter 18898,25187 r0 top
NOTR "res_smd" res_smd 18894,24973 r270 top
OC "LED2" 3.2X1.6X1.1 17366,23700.1 r90 top
OR1 "2input or595-SN74AS32DR" 2inputor 18428,24736 r0 top
OV "LED2" 3.2X1.6X1.1 17367,24051 r90 top
ov1z "8.2 v" "Zener Diode" 18499,24465 r0 top
P1 "Signals from DSP" HDR2X15 18450,25910 r0 top
P2 "Signals to DSP" HDR2X16 18450,23750 r0 top
P3 "Header 5X2" HDR2X5 19557,29628 r180 top
P4 "Signals to Input Board" HDR2X4 19847,20891 r0 top
Pot1 "20K" Pot 18750,27571 r180 top
Pot2 "20K" Pot 17505,25172 r0 top
Pot3 "20K" Pot 17586,24459 r180 top
Power1 "NCS6S4812C" Power_main 18712,22359 r180 bottom
R1 "res_smd" res_smd 19749,23523 r270 top
R2 "res_smd" res_smd 19151,23578 r90 top
R3 "res_smd" res_smd 19067,23496 r90 top
R4 "res_smd" res_smd 19153,23417 r90 top
R5 "res_smd" res_smd 19067,23339 r90 top
R6 "res_smd" res_smd 19842,23608 r270 top
R7 "res_smd" res_smd 19253,23581 r90 bottom
R8 "res_smd" res_smd 19336,23504 r90 bottom
R9 "res_smd" res_smd 19252,23422 r90 bottom
R10 "res_smd" res_smd 19957,23608 r270 top
R11 "res_smd" res_smd 19337,23345 r90 bottom
R12 "res_smd" res_smd 20050,23523 r270 top
R13 "res_smd" res_smd 19412,24099 r90 top
R14 "res_smd" res_smd 19380,23961 r0 top
R15 "res_snubber" Res_Snub 13690,23720 r0 bottom
R16 "res_snubber" Res_Snub 13901,28790 r90 bottom
R17 "res_smd" res_smd 19573,24098 r90 top
R18 "res_snubber" Res_Snub 23090,23956 r0 bottom
R19 "res_snubber" Res_Snub 23264,29101 r270 bottom
R20 "res_smd" res_smd 19613,23963 r180 top
R21 "Res3" J1-0603 15860,24135 r0 bottom value=100
R22 "Res3" J1-0603 15330,24370 r135 top value=20
R23 "Res3" J1-0603 15340,24055 r225 top value=20
R24 "20" J1-0603 15345,24055 r225 bottom value=1K
R25 "Res3" J1-0603 15330,24370 r135 bottom value=20
R26 "Res3" J1-0603 15775,27910 r0 bottom value=100
R27 "Res3" J1-0603 15290,27849.91 r270 top value=20
R28 "Res3" J1-0603 15275.79,28117 r135 top value=20
R29 "20" J1-0603 15274,28117 r135 bottom value=1K
R30 "Res3" J1-0603 15290,27849.91 r270 bottom value=20
R31 "Res3" J1-0603 20925,24592 r180 bottom value=100
R32 "Res3" J1-0603 21475,24428 r315 top value=20
R33 "Res3" J1-0603 21455,24643 r45 top value=20
R34 "20" J1-0603 21457,24641 r45 bottom value=1K
R35 "Res3" J1-0603 21475,24429 r315 bottom value=20
R36 "Res3" J1-0603 21560,28255 r180 bottom value=100
R37 "Res3" J1-0603 22006,28288 r45 top value=20
R38 "Res3" J1-0603 22013,28069 r315 top value=20
R39 "20" J1-0603 22012,28069 r315 bottom value=1K
R40 "Res3" J1-0603 22005,28286 r45 bottom value=20
R41 "res_smd" res_smd 15595,24025 r0 bottom
R42 "res_smd" res_smd 15595,23735 r0 bottom
R43 "res_smd" res_smd 15780,23880 r90 top
R44 "res_smd" res_smd 21175,24745 r180 top
R45 "res_smd" res_smd 20774,24852 r270 top
R46 "res_smd" res_smd 21025,24918 r270 top
R47 "res_smd" res_smd 19104,25029 r0 top
R48 "res_smd" res_smd 19111,24315 r180 top
R49 "res_smd" res_smd 17085,21142.6 r270 top
R50 "res_smd" res_smd 17085,20952.4 r90 top
R51 "res_smd" res_smd 19172,27853 r90 top
R52 "res_smd" res_smd 18818,28049 r0 top
R53 "res_smd" res_smd 18262,27821 r270 bottom
R54 "res_smd" res_smd 18899,24607 r180 top
R55 "res_smd" res_smd 18531,27748 r180 bottom
R56 "res_smd" res_smd 18071,25038 r180 top
R57 "res_smd" res_smd 17614,27896 r180 top
R58 "res_smd" res_smd 17693,27811 r180 top
R59 "res_smd" res_smd 17781,27895 r180 top
R60 "res_smd" res_smd 17859,27812 r180 top
R61 "res_smd" res_smd 18480,28038 r180 top
R62 "res_smd" res_smd 17595.6,27599 r180 top
R63 "res_smd" res_smd 17671,27514 r180 top
R64 "res_smd" res_smd 17759,27599 r180 top
R65 "res_smd" res_smd 17834,27509 r180 top
R66 "res_smd" res_smd 17930,24858 r180 top
R67 "res_smd" res_smd 17831,27646 r270 bottom
R68 "res_smd" res_smd 18044,24475 r180 top
R69 "res_smd" res_smd 18894,25388 r180 top
R70 "res_smd" res_smd 17932,24759 r180 top
R71 "res_smd" res_smd 18117,24643 r180 top
R72 "res_smd" res_smd 18359,24429 r270 top
R73 "res_smd" res_smd 19014,27838 r270 top
R74 "res_smd" res_smd 17549,25003 r0 top
R75 "res_smd" res_smd 18184,24315 r0 bottom
R76 "res_smd" res_smd 16096,24951 r180 top
R77 "res_smd" res_smd 18184,24227.4 r0 bottom
R78 "res_smd" res_smd 17560,24661 r180 top
R79 "res_smd" res_smd 17584,23889 r90 bottom
R80 "res_smd" res_smd 16097,24829 r180 top
R81 "res_smd" res_smd 18184,23877 r180 bottom
R82 "res_smd" res_smd 17009,24892 r180 top
R83 "res_smd" res_smd 19110,24408 r180 top
R84 "res_smd" res_smd 18184,23964.6 r0 bottom
R85 "res_smd" res_smd 15652,27753 r0 top
R86 "res_smd" res_smd 15543,27579 r90 top
R87 "res_smd" res_smd 15847,27566 r90 top
R88 "res_smd" res_smd 21564,28477.4 r90 top
R89 "res_smd" res_smd 21868,28557 r270 top
R90 "res_smd" res_smd 21688,28623 r0 top
R91 "res_smd" res_smd 18649,24792 r270 top
R92 "res_smd" res_smd 18649,24617 r90 top
R93 "res_smd" res_smd 17832,23811 r0 bottom
R94 "res_smd" res_smd 17677,23887 r270 bottom
Rdev "res_smd" res_smd 17755,24799 r90 top
Rdev2 "res_smd" res_smd 17328,25017 r180 top
Rdis1 "res_smd" J1-0603 15375,24540 r90 top
Rdis2 "res_smd" J1-0603 15420,24020 r0 top
Rdis3 "res_smd" J1-0603 15383,27781 r0 top
Rdis4 "res_smd" J1-0603 15334,28213 r0 top
Rdis5 "res_smd" J1-0603 21403,24292 r270 top
Rdis6 "res_smd" J1-0603 21373,24801 r90 top
Rdis7 "res_smd" J1-0603 21945,28407 r90 top
Rdis8 "res_smd" J1-0603 21903,27944 r180 top
Res "res_smd" res_smd 18184,24139.8 r0 bottom
Rl1 "res_smd" res_smd 19010,27619 r90 top
Rlatch "res_smd" res_smd 18901,24713 r180 top
Rlatch1 "res_smd" res_smd 18260,24431 r270 top
ROC "res_smd" res_smd 18184,24052.2 r0 bottom
Roc1tot "res_smd" res_smd 18136,24774 r180 top
Rov "res_smd" res_smd 17653,24226 r270 top
Rsense1 "Sense Resistor" "Sense resistor" 15124.91,25004 r90 bottom
RSP1 "Res_Rd" Res-RS 13884,24998 r0 bottom
RSP2 "Res_Rd" Res-RS 13915,27835 r0 bottom
RSP3 "15 ohm" Res-RS 23084,25074 r180 bottom
RSP4 "Res_Rd" Res-RS 23062,27422 r180 bottom
Rst "res_smd" res_smd 17636.6,24197 r0 bottom
SW1 "PB- K5A2 4N AU" "Push Button _New" 16504,20729 r0 top
T1 "Transformer" Transformer 15614.88,26275 r90 top
T2 "Transformer" "Big_transformer mirror" 21502,26221 r270 top
TP1 "Test Point" "Test Point" 16410,20880 r0 top
TP4 "Test Point" "Test Point" 18965,20936 r90 top
TP5 "Test Point" "Test Point" 16761,22628 r90 top
TP6 "Test Point" "Test Point" 17831,28505 r90 top
TP7 "Test Point" "Test Point" 13597,23897 r90 top
TP8 "Test Point" "Test Point" 13674,28961 r90 top
TP9 "Test Point" "Test Point" 20479,23705 r90 top
TP10 "Test Point" "Test Point" 13610,22831 r90 top
TP11 "Test Point" "Test Point" 13677,28722 r90 top
TP12 "Test Point" "Test Point" 17800,29562 r90 top
TP13 "Test Point" "Test Point" 20318,22572 r90 top
TP14 "Test Point" "Test Point" 19242,28374 r90 top
TP15 "Test Point" "Test Point" 23368,24213 r90 top
TP16 "Test Point" "Test Point" 23226,28223 r90 top
TP17 "Test Point" "Test Point" 19809,29100 r90 top
TP18 "Test Point" "Test Point" 23393,23068 r90 top
TP19 "Test Point" "Test Point" 22975,28470 r90 top
TP20 "Test Point" "Test Point" 15876,24445 r90 top
TP21 "Test Point" "Test Point" 15953,28200 r90 top
TP22 "Test Point" "Test Point" 20827,24155 r90 top
TP23 "Test Point" "Test Point" 21490,27642 r90 top
TP29 "Test Point" "Test Point" 23344,25483 r90 top
TP30 "Test Point" "Test Point" 20464,23973 r90 top
TP31 "Test Point" "Test Point" 18435,28287 r90 top
TP32 "Test Point" "Test Point" 18914,28344 r90 top
TP33 "Test Point" "Test Point" 18716,28455 r90 top
TP34 "Test Point" "Test Point" 17532,28050 r90 top
TP35 "Test Point" "Test Point" 16808,22838 r90 top
TP36 "Test Point" "Test Point" 16801,22986 r90 top
TP37 "Test Point" "Test Point" 16807,23136 r90 top
TP38 "Test Point" "Test Point" 16791,23306 r90 top
TP39 "Test Point" "Test Point" 20467,23864 r90 top
TP40 "Test Point" "Test Point" 15757,24859 r90 top
TP41 "Test Point" "Test Point" 17068,25287 r90 top
TP42 "Test Point" "Test Point" 17070,25474 r90 top
TP43 "Test Point" "Test Point" 17068,25658 r180 top
TP44 "Test Point" "Test Point" 17068,25882 r90 top
TP45 "Test Point" "Test Point" 17068,26073 r90 top
TP46 "Test Point" "Test Point" 17068,26353 r90 top
TP47 "Test Point" "Test Point" 17068,26607 r90 top
U1 "DC Input" "P-terminal 3" 18067.17,21068.82 r270 top
U2 "Jumper Vin" "P-Terminal 2" 18040,21635 r90 top
U3 "TL074CN" DIP14 18064,27912 r0 top
U4 "µA78M05CDCYR" "Reg - SOT223" 18162,23400 r270 top
U5 "L79L05ABUTR" "Reg SOT-89" 18454,22925 r0 top
XC1 "XC6216C202PR-G" SOT-89-5 15625,23875 r270 top
XC2 "XC6216C202PR-G" SOT-89-5 21163,24883 r90 top
XC4 "XC6216C202PR-G" SOT-89-5 15711,27594 r270 top
XC5 "XC6216C202PR-G" SOT-89-5 21705.37,28487.92 r90 top
ZD1 "8.2 v" "Zener Diode" 15425,24715 r90 top
ZD2 "8.2 v" "Zener Diode" 15420,23915 r90 top
ZD3 "8.2 v" "Zener Diode" 15309,28358 r90 top
ZD4 "8.2 v" "Zener Diode" 15328,27657 r45 top
ZD5 "8.2 v" "Zener Diode" 21457,24892 r180 top
ZD6 "8.2 v" "Zener Diode" 21447,24154 r270 top
ZD7 "8.2 v" "Zener Diode" 21981,27828 r270 top
ZD8 "8.2 v" "Zener Diode" 22024,28555 r270 top
ZD9 "8.2 v" "Zener Diode" 17911.19,27868 r90 bottom
ZD10 "8.2 v" "Zener Diode" 18642,28145 r90 top
ZD11 "8.2 v" "Zener Diode" 17901,27365 r90 top
ZD12 "8.2 v" "Zener Diode" 16698,24988 r180 top
ZD13 "8.2 v" "Zener Diode" 16230,24629 r0 top
ZD14 "8.2 v" "Zener Diode" 17169,24969 r90 top
ZDoc1 "8.2 v" "Zener Diode" 18292,25127 r90 top
ZDoc- "8.2 v" "Zener Diode" 17892,25077 r90 top

## Footprints (in the part's own frame and the unit in brackets; to place one, negate y for a bottom-side part, rotate by r counter-clockwise, add the part's x,y. Pads: shape width x height; smd on the part's side, far side on the other; paste and mask are expansions set on the pad)
2inputor [mm]
  oval 1.75x0.8 smd: 1(-2.775,3.81) 2(-2.775,2.54) 3(-2.775,1.27) 4(-2.775,0) 5(-2.775,-1.27) 6(-2.775,-2.54) 7(-2.775,-3.81) 8(2.775,-3.81) 9(2.775,-2.54) 10(2.775,-1.27) 11(2.775,0) 12(2.775,1.27) 13(2.775,2.54) 14(2.775,3.81)
  silkscreen extent -2.9,-4.3 1.5,4.88, body extent -1.9,-4.3 1.9,4.3, height 1.75
3.2X1.6X1.1 [mm] "SMT LED; 2 Flat Leads"
  rect 1.5x1.5 smd: 1(-1.75,0) 2(1.75,0)
  silkscreen extent -2.9,-1.15 3.2,1.15
1812 [mm] "Chip Capacitor, Body 4.5x3.2mm, IPC High Density"
  rect 1.4x3.3 smd: 1(-1.9,0) 2(1.9,0)
  silkscreen extent -0.8,-1.55 0.8,1.55, body extent -2.4,-1.7 2.4,1.7, height 1.4
"Auxlilary connector" [mm]
  rect 2.75x2.75 hole 1.1: 1(-0.027,-0.016)
  round 2.75 hole 1.1: 2(5.048,-0.016)
  silkscreen extent -2.7,-4.08 7.71,4.05
"Big_transformer mirror" [mm]
  rect 3.5x3.5 hole 2: 1(15.24,24) 2(5.969,24)
  rect 3.5x3.5 hole 2.2: 3(-7.874,24) 4(-17.653,24)
  round 3 hole 1.5: N(-6.35,17.773) N(-6.35,-17.773) N(3.81,17.773) N(3.81,-17.773)
  silkscreen extent -30.86,-35.31 29.08,19.56, body extent -30.73,-35.31 29.08,19.69, height 38.1
C0805 [mm] "Chip Capacitor, Body 2.0x1.3mm, IPC High Density"
  rect 1.1x1.4 smd: 1(-0.75,0) 2(0.75,0)
  body extent -1.1,-0.72 1.1,0.72, height 1.4
C1206 [mm] "Chip Capacitor, Body 3.2x1.6mm, IPC High Density"
  rect 1.1x1.7 smd: 1(-1.35,0) 2(1.35,0)
  silkscreen extent -0.4,-0.75 0.4,0.75, body extent -1.7,-0.9 1.7,0.9, height 1.3
"Cap tantal 22u-25V" [mm]
  rect 2.5x2.5 smd: 1(-2.794,0) 2(2.794,0)
  silkscreen extent -3.05,-1.65 3.05,1.65
"Cap Tantal 3216" [mm]
  rect 1.25x1.85 smd: 1(-1.298,0) 2(1.552,0)
  silkscreen extent -2.16,-1.65 0.53,0.82, body extent -1.52,-0.9 1.78,0.9, height 1.6
CAP-10u-16V [mm]
  rect 1.5x1.5 hole 1: 1(0,0)
  round 1.5 hole 1: 2(2.54,0)
  silkscreen extent -0.93,-2.2 3.47,2.2
Cap-Cs [mm]
  rect 3x2 smd: 1(-4.674,0.254) 2(5.279,0.254)
  rect 2x2 hole 1: 1(-4.674,0.254) 2(5.359,0.254)
  rect 3x2 smd far side: 1(-4.674,0.254) 2(5.359,0.254)
  silkscreen extent -5.94,-1.65 6.5,2.29, body extent -6.28,-0.85 6.96,1.36, height 12.7
Cap-Csnub [mm]
  round 3 hole 1.1: 1(-6.607,-0.56) 2(8.421,-0.56)
  rect 4x3 smd: 1(-3.771,-0.433) 2(5.627,-0.56)
  silkscreen extent -8.85,-5.39 10.58,5.03, body extent -8.21,-2.16 10.02,1.04, height 13.77
"Cap_3300uF_35mm height" [mil]
  rect 120x120 hole 60: +(393.7,0)
  round 120 hole 60: -(0,0)
  silkscreen extent -492,-689 886,689, body extent -493,-690 885,688, height 1378
Cap_cp [mil]
  rect 393.7x275.59 smd: 1(623,-4) 2(-536,-11)
  silkscreen extent -581,-320 679,310, body extent -586,-325 684,315, height 897
Cap_SMD [mm]
  rect 1.7x1.3 smd: 1(0,-0.889) 2(0,1.143)
  silkscreen extent -1.14,-1.91 1.14,2.16
Cap_tantalum [mm]
  rect 2.5x2.5 smd: 1(0.127,-2.413) 2(0.127,3.175)
  silkscreen extent -1.52,-2.67 1.78,3.43, body extent -1.65,-2.79 1.91,3.56, height 3.3
"Capacitor 0805" [mm]
  rect 1.3x1.7 smd: 1(-1.016,0) 2(1.016,0)
  silkscreen extent -2.03,-1.14 2.03,1.14
Cd [mil]
  rect 216.54x118.11 smd: 1(-5,-110) 2(-5,110)
  silkscreen extent -125,-180 115,180
CMC-08 [mil] "common mode coke"
  round 78.74 hole 30: 1(160,-120) 2(160,180) 3(-135,180) 4(-135,-120)
  silkscreen extent -195,-185 220,245
Connector_60A [mm]
  round 5 hole 1.5: 1(-13.716,6.858) 1(-13.716,16.764) 2(-4.318,6.858) 2(-4.318,16.764)
  silkscreen extent -18.67,0 0,19.94, body extent -18.8,-0.13 0.13,20.07, height 29.46
"Control Board" [mil]
  silkscreen extent -1444,-831 1630,4597, body extent -1444,-1037 1630,4597, height 2000
DIP14 [mm]
  rect 1.5x1.5 hole 0.9: 1(0,0)
  round 1.5 hole 0.9: 2(0,-2.5) 3(0,-5) 4(0,-7.5) 5(0,-10) 6(0,-12.5) 7(0,-15) 8(7.6,-15) 9(7.6,-12.5) 10(7.6,-10) 11(7.6,-7.5) 12(7.6,-5) 13(7.6,-2.5) 14(7.6,0)
  silkscreen extent -1.34,-16.89 8.94,1.76
GS66508B [mm] "30A, 650V bottom side cooled"
  rect 6.1x1.1 smd: D(-0.05,3.655)
  rect 1.1x1.1 smd: G(-2.98,-3.605) S(-0.05,-0.377) SS(-1.47,-3.605)
  Top Layer region: -3.525,0.5 3.425,0.5 3.425,-4.15 -0.525,-4.15 -0.525,-2.65 -3.525,-2.65
  silkscreen extent -3.65,1.03 3.55,4.33, body extent -3.55,-4.17 3.45,4.23, height 0.5
HDR2X4 [mm] "Connector; Header; 4x2 Position"
  rect 1.5x1.5 hole 0.9: 1(0,0)
  round 1.5 hole 0.9: 2(0,2.54) 3(2.54,0) 4(2.54,2.54) 5(5.08,0) 6(5.08,2.54) 7(7.62,0) 8(7.62,2.54)
  silkscreen extent -1.27,-1.27 8.89,3.81
HDR2X5 [mm] "Connector; Header; 5x2 Position"
  rect 1.5x1.5 hole 0.9: 1(0,0)
  round 1.5 hole 0.9: 2(0,2.54) 3(2.54,0) 4(2.54,2.54) 5(5.08,0) 6(5.08,2.54) 7(7.62,0) 8(7.62,2.54) 9(10.16,0) 10(10.16,2.54)
  silkscreen extent -1.27,-1.27 11.43,3.81
HDR2X15 [mm] "Connector; Header; 15x2 Position"
  rect 1.5x1.5 hole 0.9: 1(0,0)
  round 1.5 hole 0.9: 2(0,2.54) 3(2.54,0) 4(2.54,2.54) 5(5.08,0) 6(5.08,2.54) 7(7.62,0) 8(7.62,2.54) 9(10.16,0) 10(10.16,2.54) 11(12.7,0) 12(12.7,2.54) 13(15.24,0) 14(15.24,2.54) 15(17.78,0) 16(17.78,2.54) 17(20.32,0) 18(20.32,2.54) 19(22.86,0) 20(22.86,2.54) 21(25.4,0) 22(25.4,2.54) 23(27.94,0) 24(27.94,2.54) 25(30.48,0) 26(30.48,2.54) 27(33.02,0) 28(33.02,2.54) 29(35.56,0) 30(35.56,2.54)
  silkscreen extent -1.27,-1.27 36.83,3.81
HDR2X16 [mm] "Connector; Header; 16x2 Position"
  rect 1.5x1.5 hole 0.9: 1(0,0)
  round 1.5 hole 0.9: 2(0,2.54) 3(2.54,0) 4(2.54,2.54) 5(5.08,0) 6(5.08,2.54) 7(7.62,0) 8(7.62,2.54) 9(10.16,0) 10(10.16,2.54) 11(12.7,0) 12(12.7,2.54) 13(15.24,0) 14(15.24,2.54) 15(17.78,0) 16(17.78,2.54) 17(20.32,0) 18(20.32,2.54) 19(22.86,0) 20(22.86,2.54) 21(25.4,0) 22(25.4,2.54) 23(27.94,0) 24(27.94,2.54) 25(30.48,0) 26(30.48,2.54) 27(33.02,0) 28(33.02,2.54) 29(35.56,0) 30(35.56,2.54) 31(38.1,0) 32(38.1,2.54)
  silkscreen extent -1.27,-1.27 39.37,3.81
Header1*3 [mm]
  rect 1.5x2 hole 1.1: 1(-0.005,0.022)
  oval 1.5x2 hole 1.1: 2(2.535,0.022) 3(5.075,0.022)
  silkscreen extent -1.28,-1.25 6.47,1.42
"Heat Sink" [mil]
  silkscreen extent 0,0 7874,4927, body extent -1,-1 7874,4927, height 984
INA240 [mm] "TSOP, 8-Leads, Body 3.00x4.40mm, Pitch 0.65mm, IPC Medium Density"
  oval 1.4x0.45 smd: 1(-2.95,0.975) 2(-2.95,0.325) 3(-2.95,-0.325) 4(-2.95,-0.975) 5(2.95,-0.975) 6(2.95,-0.325) 7(2.95,0.325) 8(2.95,0.975)
  silkscreen extent -3.07,-1.55 1.85,1.87, body extent -2.25,-1.55 2.25,1.55, height 1.2
"Inductor output" [mm]
  rect 6x6 hole 3.2: 1(-14.622,12.291) 2(16.112,12.291) 3(15.985,-13.744) 4(-14.495,-13.744)
  body extent -17.72,-16.85 19.21,15.39, height 27.94
"Inductor surface mount" [mm]
  rect 8x6 smd: 1(7.047,0.163) 2(-7.431,0.163)
  silkscreen extent -9.97,-8.98 8.95,9.31, body extent -10.1,-9.11 9.08,9.43, height 9.4
Inductor_small [mm]
  round 6 hole 4: 1(-17.272,0.508) 2(17.399,0.508)
  silkscreen extent -21.72,-18.5 21.72,6.6, body extent -21.59,-18.47 21.59,6.73, height 43.18
Inductor_small_mirror [mm]
  round 6 hole 4: 1(-17.526,-7.239) 2(17.145,-7.239)
  silkscreen extent -21.97,-13.33 21.46,13.21, body extent -21.84,-10.43 21.34,4.62, height 43.18
Inverter [mm] "SN74LVC1G04MDBVREP"
  rect 0.6x1 smd: 1(-1.077,-1.197) 2(-0.127,-1.197) 3(0.823,-1.197) 4(0.823,1.553) 5(-1.077,1.553)
  silkscreen extent -2.05,-1.32 1.42,0.68, body extent -1.65,-0.7 1.4,1.05, height 1.45
J1-0603 [mm] "Chip Resistor, Body 1.6x0.8mm, IPC High Density"
  rect 0.7x0.9 smd: 1(-0.75,0) 2(0.75,0)
  silkscreen extent -0.2,-0.35 0.2,0.35, body extent -0.85,-0.48 0.85,0.48, height 0.9
MEJ2 [mm]
  round 1.5 hole 0.7: 1(2.95,2.5) 2(5.5,2.5) 5(12.95,2.5) 7(18.025,2.5)
  silkscreen extent 0,-4.95 19.65,5, body extent -0.05,-5 19.7,5.05, height 9.24
NMH1209SC [mm]
  round 2 hole 0.8: 1(0,0) 2(2.54,0) 4(7.62,0) 5(10.16,0) 6(12.7,0)
  round 1.5 on Bottom Overlay: 15(-0.889,-4.826)
  silkscreen extent -2,-6.16 17.5,1.34
"Output cap" [mm]
  rect 3.4x2 smd: 1(0.254,-2.402) 2(0.254,2.198)
  silkscreen extent -1.65,-3.53 2.16,3.33, body extent -1.78,-3.66 2.29,3.45, height 3.3
"P-Terminal 2" [mm]
  rect 2.75x2.75 hole 1.3: 1(-0.914,5.004)
  round 2.75 hole 1.3: 2(-0.914,-4.521)
  silkscreen extent -6.55,-9.35 6.02,9.79
"P-terminal 3" [mm]
  rect 2.75x2.75 hole 1.3: 1(-0.331,-9.829)
  round 2.75 hole 1.3: 2(-0.331,-0.309) 3(-0.331,9.211)
  silkscreen extent -6.63,-14.62 5.94,14
PCBComponent_1 [mil]
  round 80 hole 45: 0(-100,100) 1(100,100) 2(100,-100) 3(-100,-100)
  round 120 hole 70: 4(0,0)
  silkscreen extent -155,-155 155,155
Pot [mm] "3296W-1-253LF"
  round 1.2 hole 0.7: 1(0,0) 2(2.54,0) 3(5.08,0)
  silkscreen extent -2.28,-2.65 7.27,2.37
Power_main [mm]
  round 2 hole 0.8: 2(-12.065,-8.255) 3(-9.525,-8.255) 9(5.715,-8.255) 11(10.795,-8.255) 14(10.795,6.985) 16(5.715,6.985) 22(-9.525,6.985) 23(-12.065,6.985)
  silkscreen extent -17.27,-10.67 15.37,9.4, body extent -17.27,-10.67 15.37,9.4, height 10.52
"Push Button _New" [mm]
  round 1.7 hole 0.7: 1(3.556,4.115) 1(11.328,4.191) 2(3.531,11.074) 2(11.455,11.074)
  silkscreen extent 2.41,2.92 12.65,12.22
REF52.5 [mm]
  oval 1.75x0.8 smd: 1(-2.775,1.905) 2(-2.775,0.635) 3(-2.775,-0.635) 4(-2.775,-1.905) 5(2.775,-1.905) 6(2.775,-0.635) 7(2.775,0.635) 8(2.775,1.905)
  silkscreen extent -2.9,-2.5 1.5,2.98, body extent -1.9,-2.5 1.9,2.5, height 1.75
"Reg - SOT223" [mm]
  rect 1.5x0.9 smd: 1(6.604,-2.3) 2(6.604,0) 3(6.604,2.3)
  rect 1.5x3.1 smd: 4(0,0)
  round 1 on Top Overlay: 5(4.572,-2.286)
  silkscreen extent 1.02,-3.3 5.59,3.43
"Reg SOT-89" [mm]
  rect 1.5x0.6 smd: 1(4.25,-1.57) 3(4.25,1.57) 4(4.25,0)
  rect 1.5x1.83 smd: 4(0,0)
  round 1 on Top Overlay: 5(2.413,-1.651)
  silkscreen extent 1.02,-2.41 3.17,2.41
Res-RS [mm]
  rect 4x2 smd far side: 1(2.794,2.667) 2(-5.715,2.667)
  rect 2x2 hole 1.6: 1(2.794,2.667) 2(-5.715,2.667)
  rect 4x2 smd: 1(2.794,2.667) 2(-5.715,2.667)
  silkscreen extent -8.25,-17.37 5.1,5.97
res_smd [mm]
  rect 1.3x1.5 smd: 1(-0.95,0) 2(0.95,0)
  silkscreen extent -1.78,-0.89 1.78,0.89, body extent -1.7,-0.85 1.7,0.85, height 2.54
Res_Snub [mm]
  rect 2x4 smd far side: 1(0,0) 2(5.08,0)
  rect 2x2 hole 1.6: 1(0,0) 2(5.08,0)
  rect 2x4 smd: 1(0,0) 2(5.08,0)
  silkscreen extent -3.43,-3.3 8.51,26.29, body extent -3.43,4.19 8.51,26.29, height 5.03
"Sense resistor" [mm] "WSL3637"
  rect 2.95x7.62 smd: 1(-0.025,0) 2(7.47,0)
  rect 2.95x1.68 smd: 3(0,5.26) 4(7.495,5.26)
  silkscreen extent -2.1,-4.4 9.45,6.83
Si8271 [mm]
  rect 1.45x0.8 smd: 1(-2.725,1.905) 2(-2.725,0.635) 3(-2.725,-0.635) 4(-2.725,-1.905) 5(2.725,-1.905) 6(2.725,-0.635) 7(2.725,0.635) 8(2.725,1.905)
  silkscreen extent -2.85,-2.4 1.6,2.98, body extent -2,-2.4 2,2.4, height 1.75
"SOIC 8_ no EP" [mm]
  rect 1.45x0.6 smd: 1(-2.75,1.93) 2(-2.75,0.66) 3(-2.75,-0.61) 4(-2.75,-1.88) 5(2.7,-1.88) 6(2.7,-0.61) 7(2.7,0.66) 8(2.7,1.93)
  silkscreen extent -2.87,-2.48 1.57,2.9, body extent -2.03,-2.48 1.97,2.52, height 1.68
SOIC-8 [mm]
  rect 1.55x0.6 smd: 1(-1.825,2.275) 2(-1.825,1) 3(-1.825,-0.275) 4(-1.825,-1.55) 5(3.575,-1.55) 6(3.575,-0.275) 7(3.575,1) 8(3.575,2.275)
  silkscreen extent -3.2,-2.37 5.38,3.13
SOT-89-5 [mm]
  rect 1x1.5 smd: 1(-1.525,-1.9) 2(-0.125,1) 3(1.475,-1.9)
  rect 0.7x1.5 smd: 4(1.475,1.2) 5(-1.525,1.2)
  Top Layer region: 0.5,-2.65 -0.55,-2.65 -0.55,-0.825 -0.875,-0.5 -0.875,1.95 0.825,1.95 0.825,-0.5 0.5,-0.825
"SR latch" [mm] "SOIC 16"
  rect 1.55x0.6 smd: 1(-2.725,4.445) 2(-2.725,3.175) 3(-2.725,1.905) 4(-2.725,0.635) 5(-2.725,-0.635) 6(-2.725,-1.905) 7(-2.725,-3.175) 8(-2.725,-4.445) 9(2.725,-4.445) 10(2.725,-3.175) 11(2.725,-1.905) 12(2.725,-0.635) 13(2.725,0.635) 14(2.725,1.905) 15(2.725,3.175) 16(2.725,4.445)
  silkscreen extent -2.85,-5 1.6,5.42, body extent -2,-5 2,5, height 1.68
"Test Point" [mm]
  round 1.5 hole 1.2: 1(0,0)
  body extent -0.63,-0.63 0.64,0.63, height 5.08
TO-277A [mm] "Diode"
  rect 1.4x1.27 smd: 1(-1.05,-3.8) 1(1.05,-3.8)
  rect 4.8x4.72 smd: 2(0,0)
  silkscreen extent -2.75,-4.9 2.85,2.7
Transformer [mm]
  rect 3.5x3.5 hole 2.2: 1(-17.653,23.746) 2(-7.874,23.746)
  rect 3.5x3.5 hole 2: 3(5.969,23.746) 4(15.24,23.746)
  round 3 hole 1.5: N(-6.35,17.519) N(-6.35,-18.027) N(3.81,17.519) N(3.81,-18.027)
  silkscreen extent -30.86,-35.56 29.08,19.3, body extent -30.73,-35.56 29.08,19.43, height 38.1
"Zener Diode" [mm]
  rect 1x0.65 smd: 1(-1.2,0.95) 2(-1.2,-0.95) 3(1.2,0)
  silkscreen extent -1.32,-1.5 0.7,1.95, body extent -0.7,-1.5 0.7,1.5, height 1.1